# EAGLE board SparkFun_Artemis-Panel (EAGLE 9.3.0), part 1 of 17
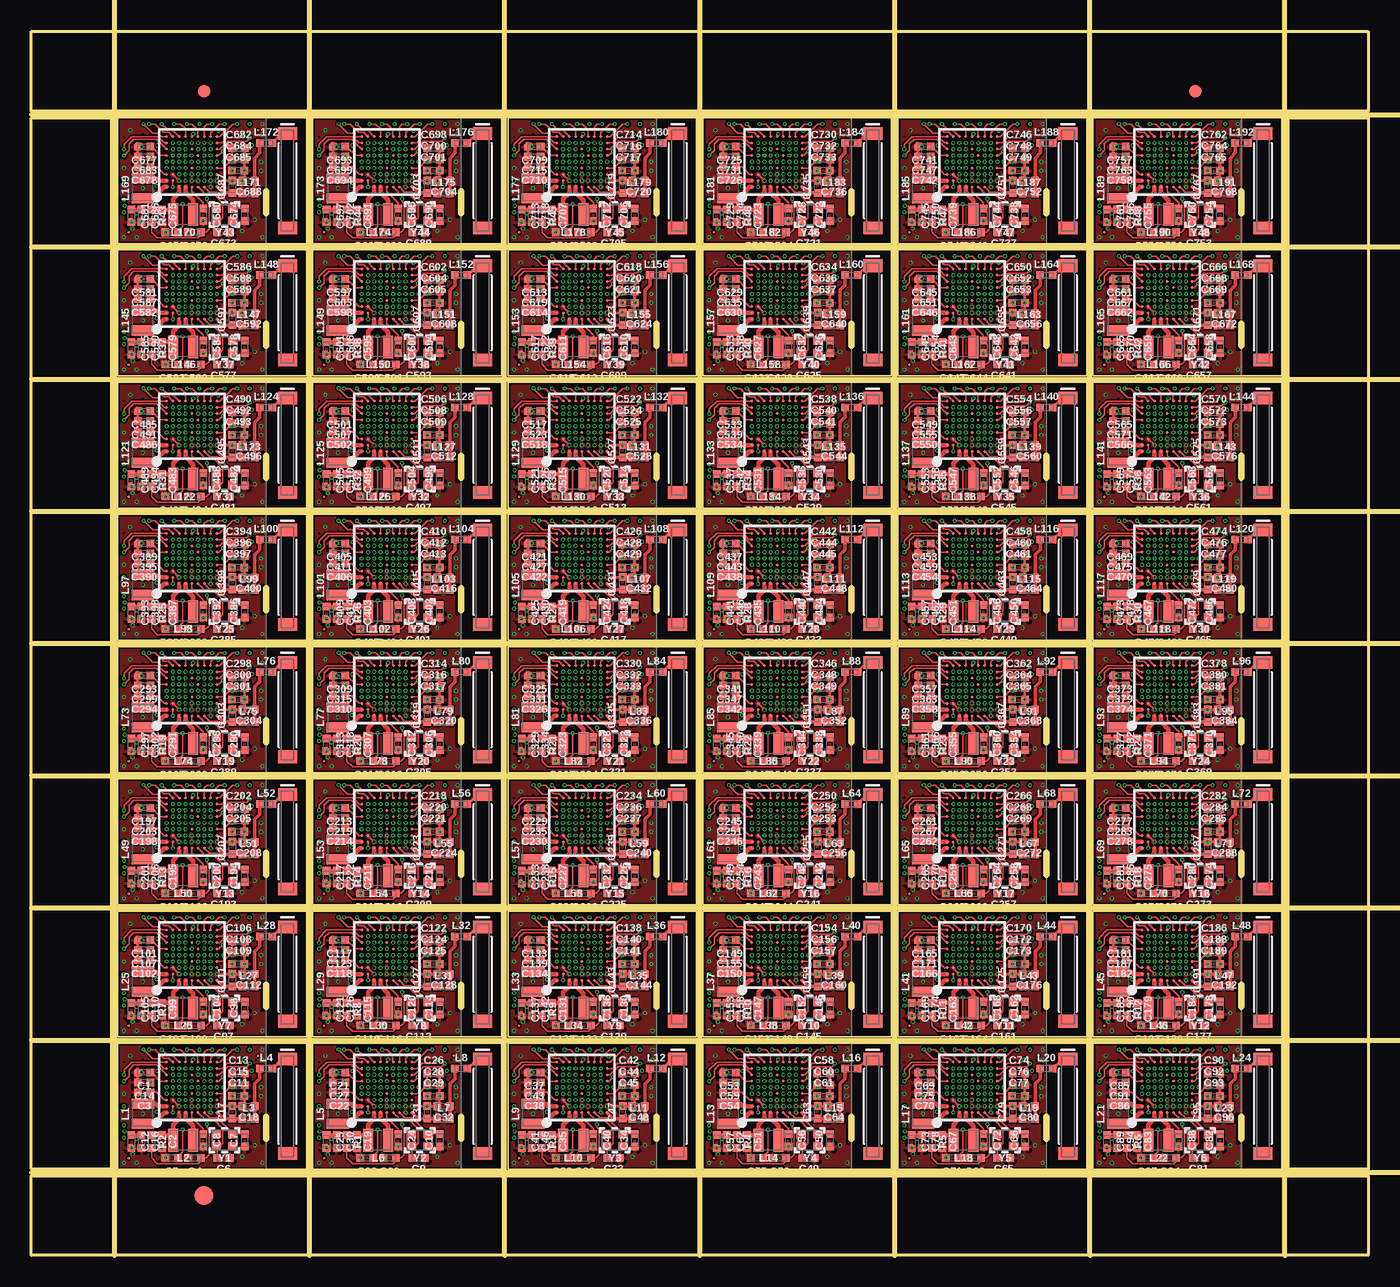
[diagram p0: board, top side]
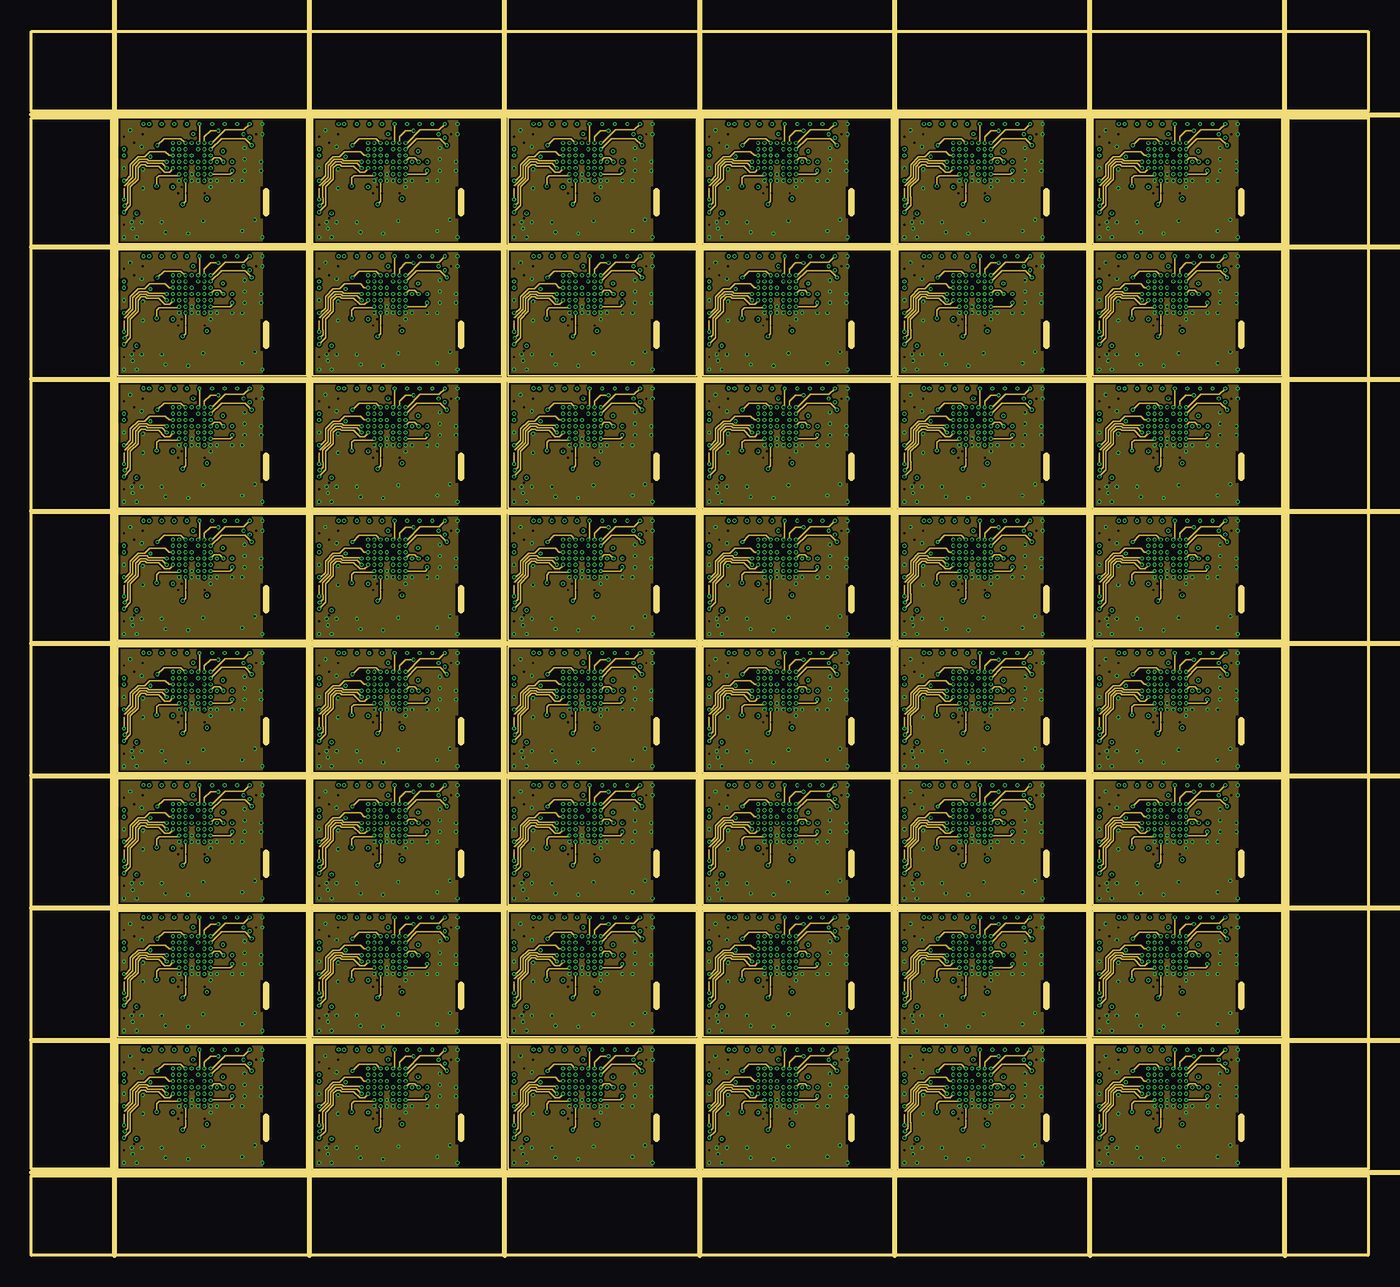
[diagram p1: board, inner layer Route2]
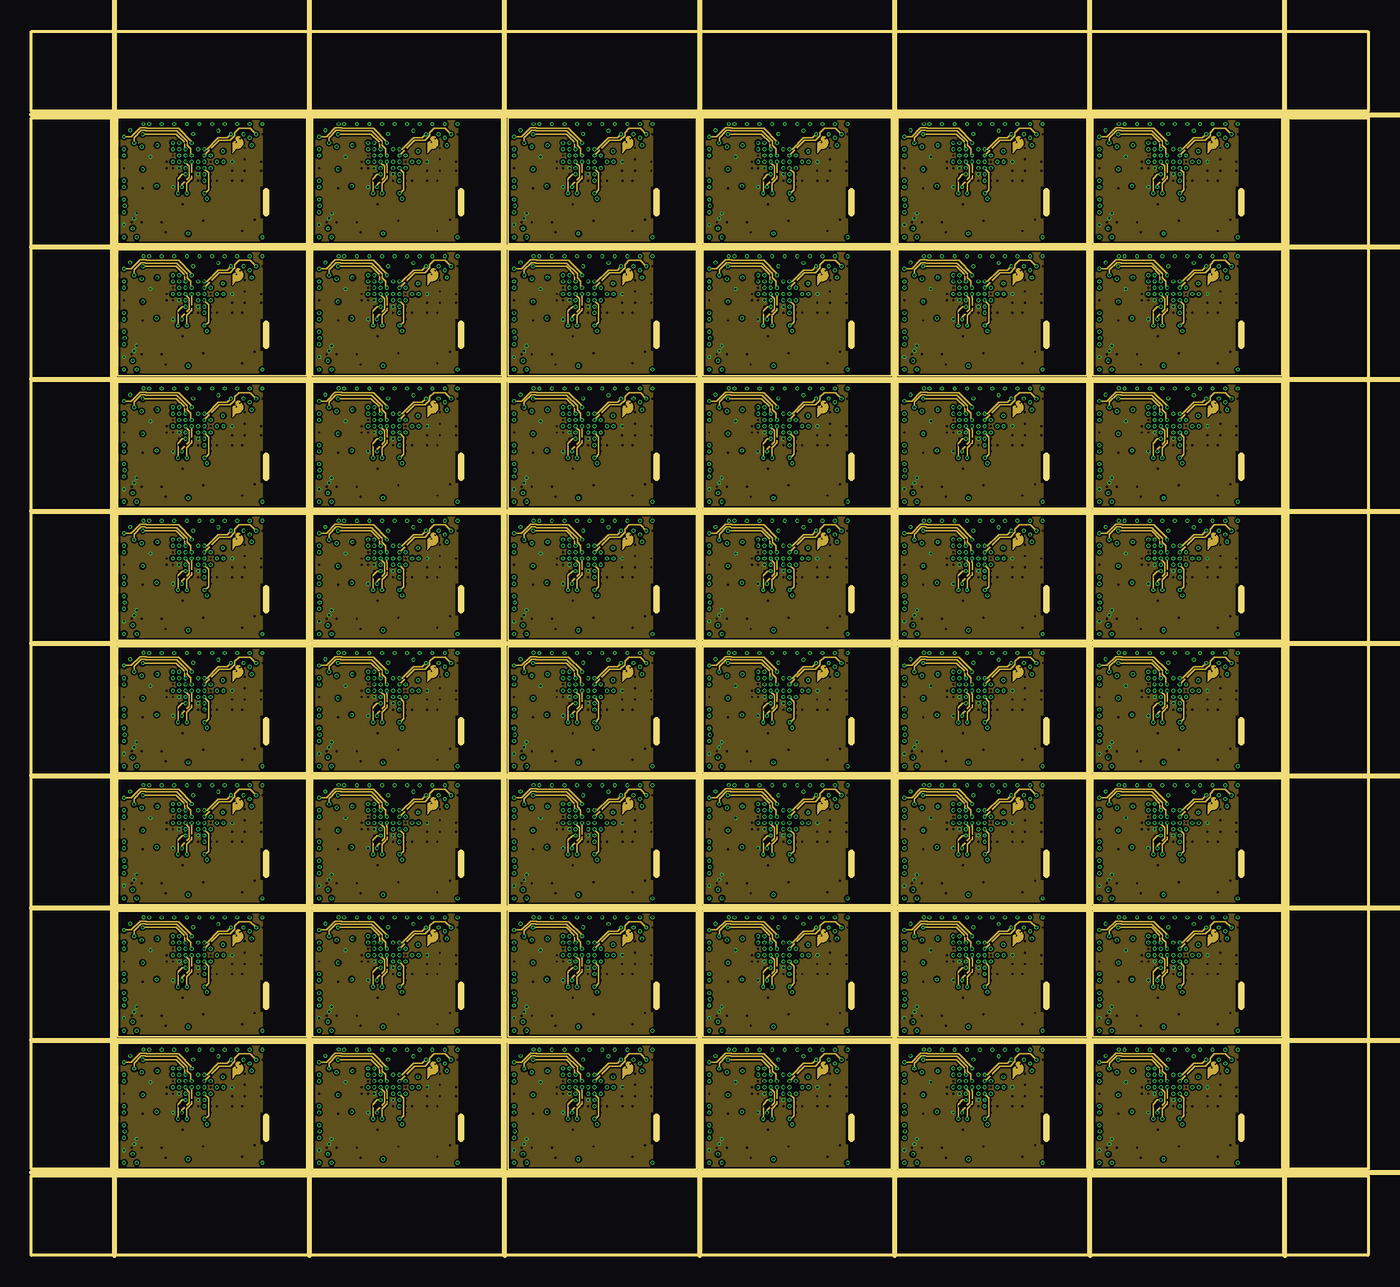
[diagram p2: board, inner layer Route15]
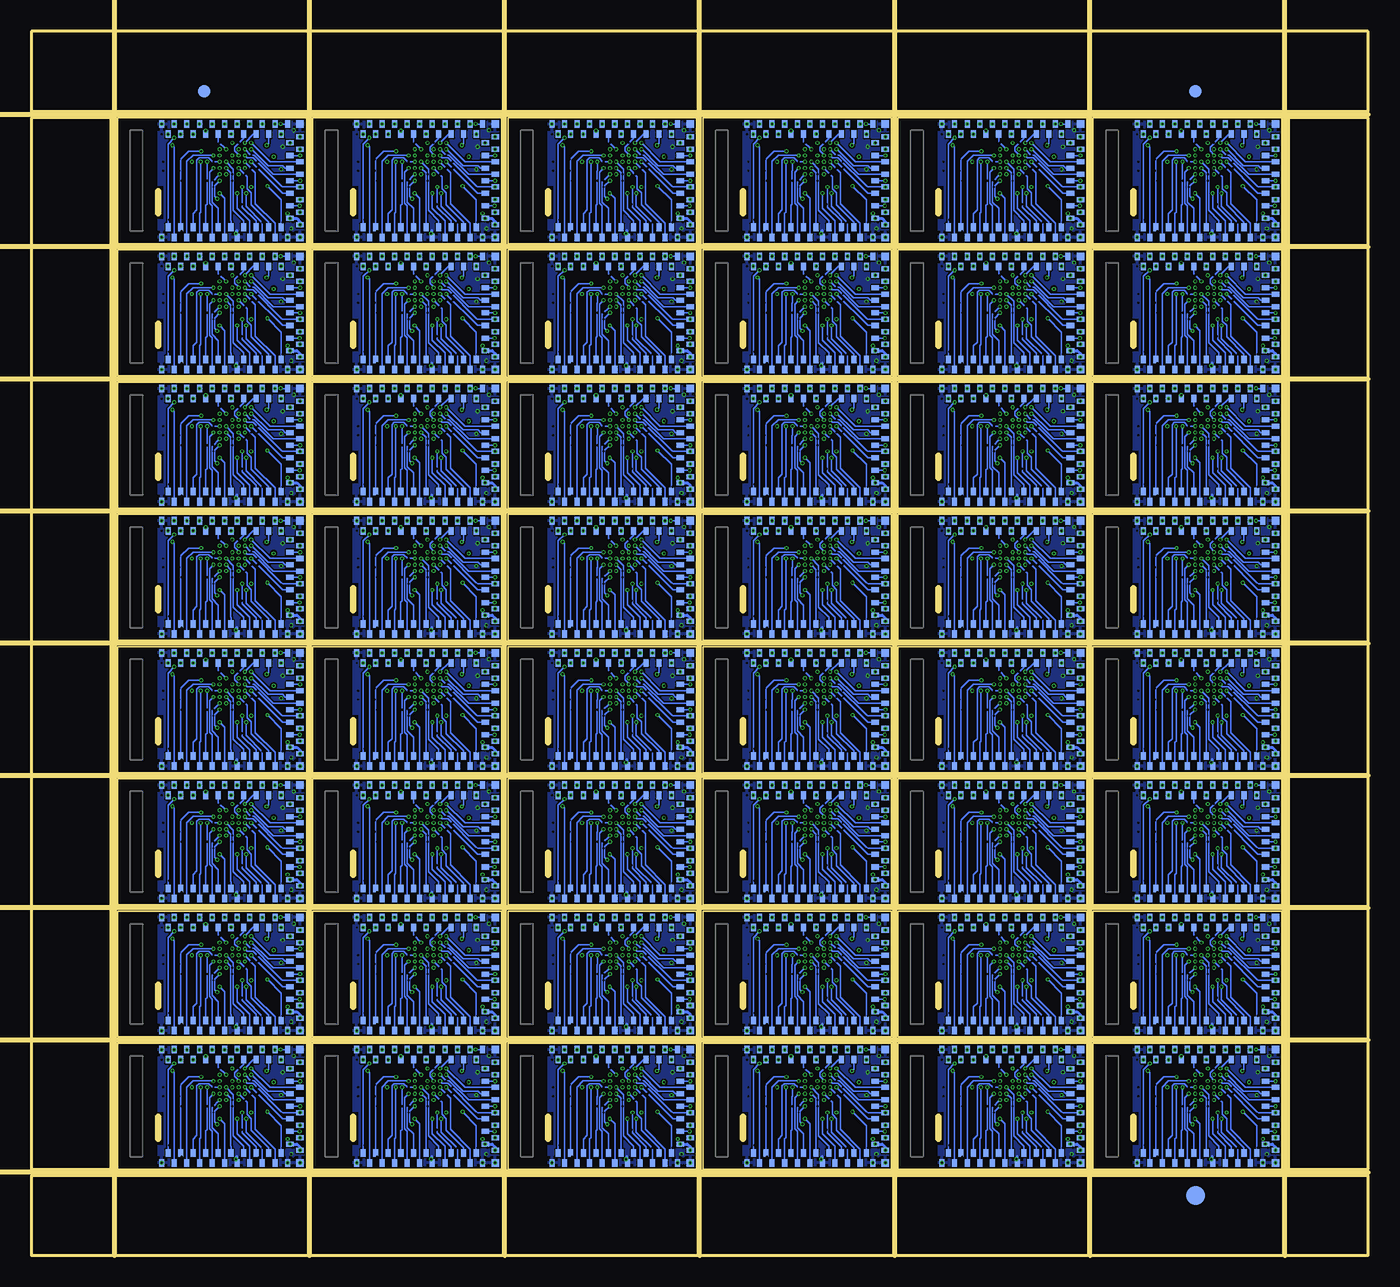
[diagram p3: board, bottom side, seen from below]

Size 106.26 x 97.27 mm. Coordinates in mm from the lower left corner, seen from the top.
Outline: 208 segments
Copper layers ((1*2)+(15*16)): Top 0.035mm / dielectric 0.213359375mm / Route2 0.035mm / dielectric 1.0161mm / Route15 0.035mm / dielectric 0.213359375mm / Bottom 0.035mm
Design rules "SparkFun-4-layer-BGA-Extreme": minimum track width 4mil, minimum drill 0.15mm, track to track 4mil, track to pad 4mil, pad to pad 4mil, via to via 4mil, smd to smd 0mil, copper to edge 4mil, drill to drill 4mil, minimum pad ring 3mil, minimum via ring 3mil, stop-mask expansion 4mil, vias tented up to drill 25mil, thermal gap 10mil
Milling: 64 lines

## Footprints (pad centres in the part's own frame; a part is rotated, then mirrored left to right if it is on the bottom)
ANT-2.4GHZ-8.0X1.0MM = smd 1 x 1.5: FEED -3.75,0; NC 3.75,0
0402-TIGHT = smd 0.6 x 0.6: 1 -0.5,0; 2 0.5,0
FIDUCIAL-1X2 = smd 1 x 1: 1 0,0
FIDUCIAL-1.5X3 = smd 1.5 x 1.5: 1 0,0
FIDUCIAL-0.2MM = smd 0.2 x 0.2: 1 0,0
MODULE_PAD = smd 0.6 x 0.4: 1 0,0
MODULE_MINI_PAD = smd 0.6 x 0.6: 1 0,0
0805-WIDE = smd 0.8 x 1.8: 1 -0.8,0; 2 0.8,0
BGA-81-5X5MM = smd 0.254 x 0.254: A1 -2,2; A2 -1.5,2; A3 -1,2; A4 -0.5,2; A5 0,2; A6 0.5,2; A7 1,2; A8 1.5,2; A9 2,2; B1 -2,1.5; B2 -1.5,1.5; B3 -1,1.5; B4 -0.5,1.5; B5 0,1.5; B6 0.5,1.5; B7 1,1.5; B8 1.5,1.5; B9 2,1.5; C1 -2,1; C2 -1.5,1; C3 -1,1; C4 -0.5,1; C5 0,1; C6 0.5,1; C7 1,1; C8 1.5,1; C9 2,1; D1 -2,0.5; D2 -1.5,0.5; D3 -1,0.5; D4 -0.5,0.5; D5 0,0.5; D6 0.5,0.5; D7 1,0.5; D8 1.5,0.5; D9 2,0.5; E1 -2,0; E2 -1.5,0; E3 -1,0; E4 -0.5,0; E5 0,0; E6 0.5,0; E7 1,0; E8 1.5,0; E9 2,0; F1 -2,-0.5; F2 -1.5,-0.5; F3 -1,-0.5; F4 -0.5,-0.5; F5 0,-0.5; F6 0.5,-0.5; F7 1,-0.5; F8 1.5,-0.5; F9 2,-0.5; G1 -2,-1; G2 -1.5,-1; G3 -1,-1; G4 -0.5,-1; G5 0,-1; G6 0.5,-1; G7 1,-1; G8 1.5,-1; G9 2,-1; H1 -2,-1.5; H2 -1.5,-1.5; H3 -1,-1.5; H4 -0.5,-1.5; H5 0,-1.5; H6 0.5,-1.5; H7 1,-1.5; H8 1.5,-1.5; H9 2,-1.5; J1 -2,-2; J2 -1.5,-2; J3 -1,-2; J4 -0.5,-2; J5 0,-2; J6 0.5,-2; J7 1,-2; J8 1.5,-2; J9 2,-2
CRYSTAL-SMD-2.0X1.6MM = smd 0.75 x 0.7: 1 -0.675,-0.5; 2 0.675,-0.5; 3 0.675,0.5; 4 -0.675,0.5

## Placement (x,y rotation side)
A1  2.4GHZ-3.2X1.6MM  [ANT-2.4GHZ-8.0X1.0MM]  20.36,11.86 270 top
A2  2.4GHZ-3.2X1.6MM  [ANT-2.4GHZ-8.0X1.0MM]  35.87,11.86 270 top
A3  2.4GHZ-3.2X1.6MM  [ANT-2.4GHZ-8.0X1.0MM]  51.37,11.86 270 top
A4  2.4GHZ-3.2X1.6MM  [ANT-2.4GHZ-8.0X1.0MM]  66.88,11.86 270 top
A5  2.4GHZ-3.2X1.6MM  [ANT-2.4GHZ-8.0X1.0MM]  82.39,11.86 270 top
A6  2.4GHZ-3.2X1.6MM  [ANT-2.4GHZ-8.0X1.0MM]  97.9,11.86 270 top
A7  2.4GHZ-3.2X1.6MM  [ANT-2.4GHZ-8.0X1.0MM]  20.36,22.37 270 top
A8  2.4GHZ-3.2X1.6MM  [ANT-2.4GHZ-8.0X1.0MM]  35.87,22.37 270 top
A9  2.4GHZ-3.2X1.6MM  [ANT-2.4GHZ-8.0X1.0MM]  51.37,22.37 270 top
A10  2.4GHZ-3.2X1.6MM  [ANT-2.4GHZ-8.0X1.0MM]  66.88,22.37 270 top
A11  2.4GHZ-3.2X1.6MM  [ANT-2.4GHZ-8.0X1.0MM]  82.39,22.37 270 top
A12  2.4GHZ-3.2X1.6MM  [ANT-2.4GHZ-8.0X1.0MM]  97.9,22.37 270 top
A13  2.4GHZ-3.2X1.6MM  [ANT-2.4GHZ-8.0X1.0MM]  20.36,32.87 270 top
A14  2.4GHZ-3.2X1.6MM  [ANT-2.4GHZ-8.0X1.0MM]  35.87,32.87 270 top
A15  2.4GHZ-3.2X1.6MM  [ANT-2.4GHZ-8.0X1.0MM]  51.37,32.87 270 top
A16  2.4GHZ-3.2X1.6MM  [ANT-2.4GHZ-8.0X1.0MM]  66.88,32.87 270 top
A17  2.4GHZ-3.2X1.6MM  [ANT-2.4GHZ-8.0X1.0MM]  82.39,32.87 270 top
A18  2.4GHZ-3.2X1.6MM  [ANT-2.4GHZ-8.0X1.0MM]  97.9,32.87 270 top
A19  2.4GHZ-3.2X1.6MM  [ANT-2.4GHZ-8.0X1.0MM]  20.36,43.38 270 top
A20  2.4GHZ-3.2X1.6MM  [ANT-2.4GHZ-8.0X1.0MM]  35.87,43.38 270 top
A21  2.4GHZ-3.2X1.6MM  [ANT-2.4GHZ-8.0X1.0MM]  51.37,43.38 270 top
A22  2.4GHZ-3.2X1.6MM  [ANT-2.4GHZ-8.0X1.0MM]  66.88,43.38 270 top
A23  2.4GHZ-3.2X1.6MM  [ANT-2.4GHZ-8.0X1.0MM]  82.39,43.38 270 top
A24  2.4GHZ-3.2X1.6MM  [ANT-2.4GHZ-8.0X1.0MM]  97.9,43.38 270 top
A25  2.4GHZ-3.2X1.6MM  [ANT-2.4GHZ-8.0X1.0MM]  20.36,53.89 270 top
A26  2.4GHZ-3.2X1.6MM  [ANT-2.4GHZ-8.0X1.0MM]  35.87,53.89 270 top
A27  2.4GHZ-3.2X1.6MM  [ANT-2.4GHZ-8.0X1.0MM]  51.37,53.89 270 top
A28  2.4GHZ-3.2X1.6MM  [ANT-2.4GHZ-8.0X1.0MM]  66.88,53.89 270 top
A29  2.4GHZ-3.2X1.6MM  [ANT-2.4GHZ-8.0X1.0MM]  82.39,53.89 270 top
A30  2.4GHZ-3.2X1.6MM  [ANT-2.4GHZ-8.0X1.0MM]  97.9,53.89 270 top
A31  2.4GHZ-3.2X1.6MM  [ANT-2.4GHZ-8.0X1.0MM]  20.36,64.4 270 top
A32  2.4GHZ-3.2X1.6MM  [ANT-2.4GHZ-8.0X1.0MM]  35.87,64.4 270 top
A33  2.4GHZ-3.2X1.6MM  [ANT-2.4GHZ-8.0X1.0MM]  51.37,64.4 270 top
A34  2.4GHZ-3.2X1.6MM  [ANT-2.4GHZ-8.0X1.0MM]  66.88,64.4 270 top
A35  2.4GHZ-3.2X1.6MM  [ANT-2.4GHZ-8.0X1.0MM]  82.39,64.4 270 top
A36  2.4GHZ-3.2X1.6MM  [ANT-2.4GHZ-8.0X1.0MM]  97.9,64.4 270 top
A37  2.4GHZ-3.2X1.6MM  [ANT-2.4GHZ-8.0X1.0MM]  20.36,74.91 270 top
A38  2.4GHZ-3.2X1.6MM  [ANT-2.4GHZ-8.0X1.0MM]  35.87,74.91 270 top
A39  2.4GHZ-3.2X1.6MM  [ANT-2.4GHZ-8.0X1.0MM]  51.37,74.91 270 top
A40  2.4GHZ-3.2X1.6MM  [ANT-2.4GHZ-8.0X1.0MM]  66.88,74.91 270 top
A41  2.4GHZ-3.2X1.6MM  [ANT-2.4GHZ-8.0X1.0MM]  82.39,74.91 270 top
A42  2.4GHZ-3.2X1.6MM  [ANT-2.4GHZ-8.0X1.0MM]  97.9,74.91 270 top
A43  2.4GHZ-3.2X1.6MM  [ANT-2.4GHZ-8.0X1.0MM]  20.36,85.41 270 top
A44  2.4GHZ-3.2X1.6MM  [ANT-2.4GHZ-8.0X1.0MM]  35.87,85.41 270 top
A45  2.4GHZ-3.2X1.6MM  [ANT-2.4GHZ-8.0X1.0MM]  51.37,85.41 270 top
A46  2.4GHZ-3.2X1.6MM  [ANT-2.4GHZ-8.0X1.0MM]  66.88,85.41 270 top
A47  2.4GHZ-3.2X1.6MM  [ANT-2.4GHZ-8.0X1.0MM]  82.39,85.41 270 top
A48  2.4GHZ-3.2X1.6MM  [ANT-2.4GHZ-8.0X1.0MM]  97.9,85.41 270 top
C1  0.47uF  [0402-TIGHT]  8.96,14.56 180 top
C2  4.7uF  [0402-TIGHT]  10.36,9.06 270 top
C3  2.2uF  [0402-TIGHT]  8.96,12.96 180 top
C4  1.0uF  [0402-TIGHT]  12.96,7.76 180 top
C5  2.2uF  [0402-TIGHT]  11.16,7.76 180 top
C6  6pF  [0402-TIGHT]  15.26,7.76 180 top
C7  6pF  [0402-TIGHT]  16.96,9.16 90 top
C8  2.2uF  [0402-TIGHT]  13.66,9.16 270 top
C9  6pF  [0402-TIGHT]  30.77,7.76 180 top
C10  6pF  [0402-TIGHT]  32.47,9.16 90 top
C11  47nF  [0402-TIGHT]  16.45,12.66 0 top
C12  1.0uF  [0402-TIGHT]  7.96,9.06 270 top
C13  1.0uF  [0402-TIGHT]  16.46,14.46 0 top
C14  1.0uF  [0402-TIGHT]  8.96,13.76 180 top
C15  1.0uF  [0402-TIGHT]  16.46,13.56 0 top
C16  2.2uF  [0402-TIGHT]  8.76,9.06 270 top
C17  DNP  [0402-TIGHT]  15.98,11.38 90 top
C18  0.5pF  [0402-TIGHT]  17.26,11.86 180 top
C19  4.7uF  [0402-TIGHT]  25.87,9.06 270 top
C20  1.0uF  [0402-TIGHT]  28.47,7.76 180 top
C21  0.47uF  [0402-TIGHT]  24.47,14.56 180 top
C22  2.2uF  [0402-TIGHT]  24.47,12.96 180 top
C23  2.2uF  [0402-TIGHT]  26.67,7.76 180 top
C24  2.2uF  [0402-TIGHT]  29.17,9.16 270 top
C25  1.0uF  [0402-TIGHT]  23.47,9.06 270 top
C26  1.0uF  [0402-TIGHT]  31.97,14.46 0 top
C27  1.0uF  [0402-TIGHT]  24.47,13.76 180 top
C28  1.0uF  [0402-TIGHT]  31.97,13.56 0 top
C29  47nF  [0402-TIGHT]  31.95,12.66 0 top
C30  2.2uF  [0402-TIGHT]  24.27,9.06 270 top
C31  DNP  [0402-TIGHT]  31.49,11.38 90 top
C32  0.5pF  [0402-TIGHT]  32.77,11.86 180 top
C33  6pF  [0402-TIGHT]  46.27,7.76 180 top
C34  6pF  [0402-TIGHT]  47.97,9.16 90 top
C35  4.7uF  [0402-TIGHT]  41.37,9.06 270 top
C36  1.0uF  [0402-TIGHT]  43.97,7.76 180 top
C37  0.47uF  [0402-TIGHT]  39.97,14.56 180 top
C38  2.2uF  [0402-TIGHT]  39.97,12.96 180 top
C39  2.2uF  [0402-TIGHT]  42.17,7.76 180 top
C40  2.2uF  [0402-TIGHT]  44.67,9.16 270 top
C41  1.0uF  [0402-TIGHT]  38.97,9.06 270 top
C42  1.0uF  [0402-TIGHT]  47.47,14.46 0 top
C43  1.0uF  [0402-TIGHT]  39.97,13.76 180 top
C44  1.0uF  [0402-TIGHT]  47.47,13.56 0 top
C45  47nF  [0402-TIGHT]  47.46,12.66 0 top
C46  2.2uF  [0402-TIGHT]  39.77,9.06 270 top
C47  DNP  [0402-TIGHT]  46.99,11.38 90 top
C48  0.5pF  [0402-TIGHT]  48.27,11.86 180 top
C49  6pF  [0402-TIGHT]  61.78,7.76 180 top
C50  6pF  [0402-TIGHT]  63.48,9.16 90 top
C51  4.7uF  [0402-TIGHT]  56.88,9.06 270 top
C52  1.0uF  [0402-TIGHT]  59.48,7.76 180 top
C53  0.47uF  [0402-TIGHT]  55.48,14.56 180 top
C54  2.2uF  [0402-TIGHT]  55.48,12.96 180 top
C55  2.2uF  [0402-TIGHT]  57.68,7.76 180 top
C56  2.2uF  [0402-TIGHT]  60.18,9.16 270 top
C57  1.0uF  [0402-TIGHT]  54.48,9.06 270 top
C58  1.0uF  [0402-TIGHT]  62.98,14.46 0 top
C59  1.0uF  [0402-TIGHT]  55.48,13.76 180 top
C60  1.0uF  [0402-TIGHT]  62.98,13.56 0 top
C61  47nF  [0402-TIGHT]  62.97,12.66 0 top
C62  2.2uF  [0402-TIGHT]  55.28,9.06 270 top
C63  DNP  [0402-TIGHT]  62.5,11.38 90 top
C64  0.5pF  [0402-TIGHT]  63.78,11.86 180 top
C65  6pF  [0402-TIGHT]  77.29,7.76 180 top
C66  6pF  [0402-TIGHT]  78.99,9.16 90 top
C67  4.7uF  [0402-TIGHT]  72.39,9.06 270 top
C68  1.0uF  [0402-TIGHT]  74.99,7.76 180 top
C69  0.47uF  [0402-TIGHT]  70.99,14.56 180 top
C70  2.2uF  [0402-TIGHT]  70.99,12.96 180 top
C71  2.2uF  [0402-TIGHT]  73.19,7.76 180 top
C72  2.2uF  [0402-TIGHT]  75.69,9.16 270 top
C73  1.0uF  [0402-TIGHT]  69.99,9.06 270 top
C74  1.0uF  [0402-TIGHT]  78.49,14.46 0 top
C75  1.0uF  [0402-TIGHT]  70.99,13.76 180 top
C76  1.0uF  [0402-TIGHT]  78.49,13.56 0 top
C77  47nF  [0402-TIGHT]  78.48,12.66 0 top
C78  2.2uF  [0402-TIGHT]  70.79,9.06 270 top
C79  DNP  [0402-TIGHT]  78.01,11.38 90 top
C80  0.5pF  [0402-TIGHT]  79.29,11.86 180 top
C81  6pF  [0402-TIGHT]  92.8,7.76 180 top
C82  6pF  [0402-TIGHT]  94.5,9.16 90 top
C83  4.7uF  [0402-TIGHT]  87.9,9.06 270 top
C84  1.0uF  [0402-TIGHT]  90.5,7.76 180 top
C85  0.47uF  [0402-TIGHT]  86.5,14.56 180 top
C86  2.2uF  [0402-TIGHT]  86.5,12.96 180 top
C87  2.2uF  [0402-TIGHT]  88.7,7.76 180 top
C88  2.2uF  [0402-TIGHT]  91.2,9.16 270 top
C89  1.0uF  [0402-TIGHT]  85.5,9.06 270 top
C90  1.0uF  [0402-TIGHT]  94,14.46 0 top
C91  1.0uF  [0402-TIGHT]  86.5,13.76 180 top
C92  1.0uF  [0402-TIGHT]  94,13.56 0 top
C93  47nF  [0402-TIGHT]  93.99,12.66 0 top
C94  2.2uF  [0402-TIGHT]  86.3,9.06 270 top
C95  DNP  [0402-TIGHT]  93.52,11.38 90 top
C96  0.5pF  [0402-TIGHT]  94.8,11.86 180 top
C97  6pF  [0402-TIGHT]  15.26,18.27 180 top
C98  6pF  [0402-TIGHT]  16.96,19.67 90 top
C99  4.7uF  [0402-TIGHT]  10.36,19.57 270 top
C100  1.0uF  [0402-TIGHT]  12.96,18.27 180 top
C101  0.47uF  [0402-TIGHT]  8.96,25.07 180 top
C102  2.2uF  [0402-TIGHT]  8.96,23.47 180 top
C103  2.2uF  [0402-TIGHT]  11.16,18.27 180 top
C104  2.2uF  [0402-TIGHT]  13.66,19.67 270 top
C105  1.0uF  [0402-TIGHT]  7.96,19.57 270 top
C106  1.0uF  [0402-TIGHT]  16.46,24.97 0 top
C107  1.0uF  [0402-TIGHT]  8.96,24.27 180 top
C108  1.0uF  [0402-TIGHT]  16.46,24.07 0 top
C109  47nF  [0402-TIGHT]  16.45,23.17 0 top
C110  2.2uF  [0402-TIGHT]  8.76,19.57 270 top
C111  DNP  [0402-TIGHT]  15.98,21.89 90 top
C112  0.5pF  [0402-TIGHT]  17.26,22.37 180 top
C113  6pF  [0402-TIGHT]  30.77,18.27 180 top
C114  6pF  [0402-TIGHT]  32.47,19.67 90 top
C115  4.7uF  [0402-TIGHT]  25.87,19.57 270 top
C116  1.0uF  [0402-TIGHT]  28.47,18.27 180 top
C117  0.47uF  [0402-TIGHT]  24.47,25.07 180 top
C118  2.2uF  [0402-TIGHT]  24.47,23.47 180 top
C119  2.2uF  [0402-TIGHT]  26.67,18.27 180 top
C120  2.2uF  [0402-TIGHT]  29.17,19.67 270 top
C121  1.0uF  [0402-TIGHT]  23.47,19.57 270 top
C122  1.0uF  [0402-TIGHT]  31.97,24.97 0 top
C123  1.0uF  [0402-TIGHT]  24.47,24.27 180 top
C124  1.0uF  [0402-TIGHT]  31.97,24.07 0 top
C125  47nF  [0402-TIGHT]  31.95,23.17 0 top
C126  2.2uF  [0402-TIGHT]  24.27,19.57 270 top
C127  DNP  [0402-TIGHT]  31.49,21.89 90 top
C128  0.5pF  [0402-TIGHT]  32.77,22.37 180 top
C129  6pF  [0402-TIGHT]  46.27,18.27 180 top
C130  6pF  [0402-TIGHT]  47.97,19.67 90 top
C131  4.7uF  [0402-TIGHT]  41.37,19.57 270 top
C132  1.0uF  [0402-TIGHT]  43.97,18.27 180 top
C133  0.47uF  [0402-TIGHT]  39.97,25.07 180 top
C134  2.2uF  [0402-TIGHT]  39.97,23.47 180 top
C135  2.2uF  [0402-TIGHT]  42.17,18.27 180 top
C136  2.2uF  [0402-TIGHT]  44.67,19.67 270 top
C137  1.0uF  [0402-TIGHT]  38.97,19.57 270 top
C138  1.0uF  [0402-TIGHT]  47.47,24.97 0 top
C139  1.0uF  [0402-TIGHT]  39.97,24.27 180 top
C140  1.0uF  [0402-TIGHT]  47.47,24.07 0 top
C141  47nF  [0402-TIGHT]  47.46,23.17 0 top
C142  2.2uF  [0402-TIGHT]  39.77,19.57 270 top
C143  DNP  [0402-TIGHT]  46.99,21.89 90 top
C144  0.5pF  [0402-TIGHT]  48.27,22.37 180 top
C145  6pF  [0402-TIGHT]  61.78,18.27 180 top
C146  6pF  [0402-TIGHT]  63.48,19.67 90 top
C147  4.7uF  [0402-TIGHT]  56.88,19.57 270 top
C148  1.0uF  [0402-TIGHT]  59.48,18.27 180 top
C149  0.47uF  [0402-TIGHT]  55.48,25.07 180 top
C150  2.2uF  [0402-TIGHT]  55.48,23.47 180 top
C151  2.2uF  [0402-TIGHT]  57.68,18.27 180 top
C152  2.2uF  [0402-TIGHT]  60.18,19.67 270 top
C153  1.0uF  [0402-TIGHT]  54.48,19.57 270 top
C154  1.0uF  [0402-TIGHT]  62.98,24.97 0 top
C155  1.0uF  [0402-TIGHT]  55.48,24.27 180 top
C156  1.0uF  [0402-TIGHT]  62.98,24.07 0 top
C157  47nF  [0402-TIGHT]  62.97,23.17 0 top
C158  2.2uF  [0402-TIGHT]  55.28,19.57 270 top
C159  DNP  [0402-TIGHT]  62.5,21.89 90 top
C160  0.5pF  [0402-TIGHT]  63.78,22.37 180 top
C161  6pF  [0402-TIGHT]  77.29,18.27 180 top
C162  6pF  [0402-TIGHT]  78.99,19.67 90 top
C163  4.7uF  [0402-TIGHT]  72.39,19.57 270 top
C164  1.0uF  [0402-TIGHT]  74.99,18.27 180 top
C165  0.47uF  [0402-TIGHT]  70.99,25.07 180 top
C166  2.2uF  [0402-TIGHT]  70.99,23.47 180 top
C167  2.2uF  [0402-TIGHT]  73.19,18.27 180 top
C168  2.2uF  [0402-TIGHT]  75.69,19.67 270 top
C169  1.0uF  [0402-TIGHT]  69.99,19.57 270 top
C170  1.0uF  [0402-TIGHT]  78.49,24.97 0 top
C171  1.0uF  [0402-TIGHT]  70.99,24.27 180 top
C172  1.0uF  [0402-TIGHT]  78.49,24.07 0 top
C173  47nF  [0402-TIGHT]  78.48,23.17 0 top
C174  2.2uF  [0402-TIGHT]  70.79,19.57 270 top
C175  DNP  [0402-TIGHT]  78.01,21.89 90 top
C176  0.5pF  [0402-TIGHT]  79.29,22.37 180 top
C177  6pF  [0402-TIGHT]  92.8,18.27 180 top
C178  6pF  [0402-TIGHT]  94.5,19.67 90 top
C179  4.7uF  [0402-TIGHT]  87.9,19.57 270 top
C180  1.0uF  [0402-TIGHT]  90.5,18.27 180 top
C181  0.47uF  [0402-TIGHT]  86.5,25.07 180 top
C182  2.2uF  [0402-TIGHT]  86.5,23.47 180 top
C183  2.2uF  [0402-TIGHT]  88.7,18.27 180 top
C184  2.2uF  [0402-TIGHT]  91.2,19.67 270 top
C185  1.0uF  [0402-TIGHT]  85.5,19.57 270 top
C186  1.0uF  [0402-TIGHT]  94,24.97 0 top
C187  1.0uF  [0402-TIGHT]  86.5,24.27 180 top
C188  1.0uF  [0402-TIGHT]  94,24.07 0 top
C189  47nF  [0402-TIGHT]  93.99,23.17 0 top
C190  2.2uF  [0402-TIGHT]  86.3,19.57 270 top
C191  DNP  [0402-TIGHT]  93.52,21.89 90 top
C192  0.5pF  [0402-TIGHT]  94.8,22.37 180 top
C193  6pF  [0402-TIGHT]  15.26,28.77 180 top
C194  6pF  [0402-TIGHT]  16.96,30.17 90 top
C195  4.7uF  [0402-TIGHT]  10.36,30.07 270 top
C196  1.0uF  [0402-TIGHT]  12.96,28.77 180 top
C197  0.47uF  [0402-TIGHT]  8.96,35.57 180 top
C198  2.2uF  [0402-TIGHT]  8.96,33.97 180 top
C199  2.2uF  [0402-TIGHT]  11.16,28.77 180 top
C200  2.2uF  [0402-TIGHT]  13.66,30.17 270 top
C201  1.0uF  [0402-TIGHT]  7.96,30.07 270 top
C202  1.0uF  [0402-TIGHT]  16.46,35.47 0 top
C203  1.0uF  [0402-TIGHT]  8.96,34.77 180 top
C204  1.0uF  [0402-TIGHT]  16.46,34.57 0 top
C205  47nF  [0402-TIGHT]  16.45,33.67 0 top
C206  2.2uF  [0402-TIGHT]  8.76,30.07 270 top
C207  DNP  [0402-TIGHT]  15.98,32.4 90 top
C208  0.5pF  [0402-TIGHT]  17.26,32.87 180 top
C209  6pF  [0402-TIGHT]  30.77,28.77 180 top
C210  6pF  [0402-TIGHT]  32.47,30.17 90 top
C211  4.7uF  [0402-TIGHT]  25.87,30.07 270 top
C212  1.0uF  [0402-TIGHT]  28.47,28.77 180 top
C213  0.47uF  [0402-TIGHT]  24.47,35.57 180 top
C214  2.2uF  [0402-TIGHT]  24.47,33.97 180 top
C215  2.2uF  [0402-TIGHT]  26.67,28.77 180 top
C216  2.2uF  [0402-TIGHT]  29.17,30.17 270 top
C217  1.0uF  [0402-TIGHT]  23.47,30.07 270 top
C218  1.0uF  [0402-TIGHT]  31.97,35.47 0 top
C219  1.0uF  [0402-TIGHT]  24.47,34.77 180 top
C220  1.0uF  [0402-TIGHT]  31.97,34.57 0 top
C221  47nF  [0402-TIGHT]  31.95,33.67 0 top
C222  2.2uF  [0402-TIGHT]  24.27,30.07 270 top
C223  DNP  [0402-TIGHT]  31.49,32.4 90 top
C224  0.5pF  [0402-TIGHT]  32.77,32.87 180 top
C225  6pF  [0402-TIGHT]  46.27,28.77 180 top
C226  6pF  [0402-TIGHT]  47.97,30.17 90 top
C227  4.7uF  [0402-TIGHT]  41.37,30.07 270 top
C228  1.0uF  [0402-TIGHT]  43.97,28.77 180 top
C229  0.47uF  [0402-TIGHT]  39.97,35.57 180 top
C230  2.2uF  [0402-TIGHT]  39.97,33.97 180 top
C231  2.2uF  [0402-TIGHT]  42.17,28.77 180 top
C232  2.2uF  [0402-TIGHT]  44.67,30.17 270 top
C233  1.0uF  [0402-TIGHT]  38.97,30.07 270 top
C234  1.0uF  [0402-TIGHT]  47.47,35.47 0 top
C235  1.0uF  [0402-TIGHT]  39.97,34.77 180 top
C236  1.0uF  [0402-TIGHT]  47.47,34.57 0 top
C237  47nF  [0402-TIGHT]  47.46,33.67 0 top
C238  2.2uF  [0402-TIGHT]  39.77,30.07 270 top
C239  DNP  [0402-TIGHT]  46.99,32.4 90 top
C240  0.5pF  [0402-TIGHT]  48.27,32.87 180 top
C241  6pF  [0402-TIGHT]  61.78,28.77 180 top
C242  6pF  [0402-TIGHT]  63.48,30.17 90 top
C243  4.7uF  [0402-TIGHT]  56.88,30.07 270 top
C244  1.0uF  [0402-TIGHT]  59.48,28.77 180 top
C245  0.47uF  [0402-TIGHT]  55.48,35.57 180 top
C246  2.2uF  [0402-TIGHT]  55.48,33.97 180 top
C247  2.2uF  [0402-TIGHT]  57.68,28.77 180 top
C248  2.2uF  [0402-TIGHT]  60.18,30.17 270 top
C249  1.0uF  [0402-TIGHT]  54.48,30.07 270 top
C250  1.0uF  [0402-TIGHT]  62.98,35.47 0 top
C251  1.0uF  [0402-TIGHT]  55.48,34.77 180 top
C252  1.0uF  [0402-TIGHT]  62.98,34.57 0 top
C253  47nF  [0402-TIGHT]  62.97,33.67 0 top
C254  2.2uF  [0402-TIGHT]  55.28,30.07 270 top
C255  DNP  [0402-TIGHT]  62.5,32.4 90 top
C256  0.5pF  [0402-TIGHT]  63.78,32.87 180 top
C257  6pF  [0402-TIGHT]  77.29,28.77 180 top
C258  6pF  [0402-TIGHT]  78.99,30.17 90 top
C259  4.7uF  [0402-TIGHT]  72.39,30.07 270 top
C260  1.0uF  [0402-TIGHT]  74.99,28.77 180 top
C261  0.47uF  [0402-TIGHT]  70.99,35.57 180 top
C262  2.2uF  [0402-TIGHT]  70.99,33.97 180 top
C263  2.2uF  [0402-TIGHT]  73.19,28.77 180 top
C264  2.2uF  [0402-TIGHT]  75.69,30.17 270 top
C265  1.0uF  [0402-TIGHT]  69.99,30.07 270 top
C266  1.0uF  [0402-TIGHT]  78.49,35.47 0 top
C267  1.0uF  [0402-TIGHT]  70.99,34.77 180 top
C268  1.0uF  [0402-TIGHT]  78.49,34.57 0 top
C269  47nF  [0402-TIGHT]  78.48,33.67 0 top
C270  2.2uF  [0402-TIGHT]  70.79,30.07 270 top
C271  DNP  [0402-TIGHT]  78.01,32.4 90 top
C272  0.5pF  [0402-TIGHT]  79.29,32.87 180 top
C273  6pF  [0402-TIGHT]  92.8,28.77 180 top
C274  6pF  [0402-TIGHT]  94.5,30.17 90 top
C275  4.7uF  [0402-TIGHT]  87.9,30.07 270 top
C276  1.0uF  [0402-TIGHT]  90.5,28.77 180 top
C277  0.47uF  [0402-TIGHT]  86.5,35.57 180 top
C278  2.2uF  [0402-TIGHT]  86.5,33.97 180 top
C279  2.2uF  [0402-TIGHT]  88.7,28.77 180 top
C280  2.2uF  [0402-TIGHT]  91.2,30.17 270 top
C281  1.0uF  [0402-TIGHT]  85.5,30.07 270 top
C282  1.0uF  [0402-TIGHT]  94,35.47 0 top
C283  1.0uF  [0402-TIGHT]  86.5,34.77 180 top
C284  1.0uF  [0402-TIGHT]  94,34.57 0 top
C285  47nF  [0402-TIGHT]  93.99,33.67 0 top
C286  2.2uF  [0402-TIGHT]  86.3,30.07 270 top
C287  DNP  [0402-TIGHT]  93.52,32.4 90 top
C288  0.5pF  [0402-TIGHT]  94.8,32.87 180 top
C289  6pF  [0402-TIGHT]  15.26,39.28 180 top
C290  6pF  [0402-TIGHT]  16.96,40.68 90 top
C291  4.7uF  [0402-TIGHT]  10.36,40.58 270 top
C292  1.0uF  [0402-TIGHT]  12.96,39.28 180 top
C293  0.47uF  [0402-TIGHT]  8.96,46.08 180 top
C294  2.2uF  [0402-TIGHT]  8.96,44.48 180 top
C295  2.2uF  [0402-TIGHT]  11.16,39.28 180 top
C296  2.2uF  [0402-TIGHT]  13.66,40.68 270 top
C297  1.0uF  [0402-TIGHT]  7.96,40.58 270 top
C298  1.0uF  [0402-TIGHT]  16.46,45.98 0 top
C299  1.0uF  [0402-TIGHT]  8.96,45.28 180 top
C300  1.0uF  [0402-TIGHT]  16.46,45.08 0 top
C301  47nF  [0402-TIGHT]  16.45,44.18 0 top
C302  2.2uF  [0402-TIGHT]  8.76,40.58 270 top
C303  DNP  [0402-TIGHT]  15.98,42.9 90 top
C304  0.5pF  [0402-TIGHT]  17.26,43.38 180 top
C305  6pF  [0402-TIGHT]  30.77,39.28 180 top
C306  6pF  [0402-TIGHT]  32.47,40.68 90 top
C307  4.7uF  [0402-TIGHT]  25.87,40.58 270 top
C308  1.0uF  [0402-TIGHT]  28.47,39.28 180 top
C309  0.47uF  [0402-TIGHT]  24.47,46.08 180 top
C310  2.2uF  [0402-TIGHT]  24.47,44.48 180 top
C311  2.2uF  [0402-TIGHT]  26.67,39.28 180 top
C312  2.2uF  [0402-TIGHT]  29.17,40.68 270 top
C313  1.0uF  [0402-TIGHT]  23.47,40.58 270 top
C314  1.0uF  [0402-TIGHT]  31.97,45.98 0 top
C315  1.0uF  [0402-TIGHT]  24.47,45.28 180 top
C316  1.0uF  [0402-TIGHT]  31.97,45.08 0 top
C317  47nF  [0402-TIGHT]  31.95,44.18 0 top
C318  2.2uF  [0402-TIGHT]  24.27,40.58 270 top
C319  DNP  [0402-TIGHT]  31.49,42.9 90 top
C320  0.5pF  [0402-TIGHT]  32.77,43.38 180 top
C321  6pF  [0402-TIGHT]  46.27,39.28 180 top
C322  6pF  [0402-TIGHT]  47.97,40.68 90 top
C323  4.7uF  [0402-TIGHT]  41.37,40.58 270 top
C324  1.0uF  [0402-TIGHT]  43.97,39.28 180 top
C325  0.47uF  [0402-TIGHT]  39.97,46.08 180 top
C326  2.2uF  [0402-TIGHT]  39.97,44.48 180 top
C327  2.2uF  [0402-TIGHT]  42.17,39.28 180 top
C328  2.2uF  [0402-TIGHT]  44.67,40.68 270 top
C329  1.0uF  [0402-TIGHT]  38.97,40.58 270 top
C330  1.0uF  [0402-TIGHT]  47.47,45.98 0 top
C331  1.0uF  [0402-TIGHT]  39.97,45.28 180 top
C332  1.0uF  [0402-TIGHT]  47.47,45.08 0 top
C333  47nF  [0402-TIGHT]  47.46,44.18 0 top
C334  2.2uF  [0402-TIGHT]  39.77,40.58 270 top
C335  DNP  [0402-TIGHT]  46.99,42.9 90 top
C336  0.5pF  [0402-TIGHT]  48.27,43.38 180 top
C337  6pF  [0402-TIGHT]  61.78,39.28 180 top
C338  6pF  [0402-TIGHT]  63.48,40.68 90 top
C339  4.7uF  [0402-TIGHT]  56.88,40.58 270 top
C340  1.0uF  [0402-TIGHT]  59.48,39.28 180 top
C341  0.47uF  [0402-TIGHT]  55.48,46.08 180 top
C342  2.2uF  [0402-TIGHT]  55.48,44.48 180 top
C343  2.2uF  [0402-TIGHT]  57.68,39.28 180 top
C344  2.2uF  [0402-TIGHT]  60.18,40.68 270 top
C345  1.0uF  [0402-TIGHT]  54.48,40.58 270 top
C346  1.0uF  [0402-TIGHT]  62.98,45.98 0 top
C347  1.0uF  [0402-TIGHT]  55.48,45.28 180 top
C348  1.0uF  [0402-TIGHT]  62.98,45.08 0 top
C349  47nF  [0402-TIGHT]  62.97,44.18 0 top
C350  2.2uF  [0402-TIGHT]  55.28,40.58 270 top
C351  DNP  [0402-TIGHT]  62.5,42.9 90 top
C352  0.5pF  [0402-TIGHT]  63.78,43.38 180 top
C353  6pF  [0402-TIGHT]  77.29,39.28 180 top
C354  6pF  [0402-TIGHT]  78.99,40.68 90 top
C355  4.7uF  [0402-TIGHT]  72.39,40.58 270 top
C356  1.0uF  [0402-TIGHT]  74.99,39.28 180 top
C357  0.47uF  [0402-TIGHT]  70.99,46.08 180 top
C358  2.2uF  [0402-TIGHT]  70.99,44.48 180 top
C359  2.2uF  [0402-TIGHT]  73.19,39.28 180 top
C360  2.2uF  [0402-TIGHT]  75.69,40.68 270 top
C361  1.0uF  [0402-TIGHT]  69.99,40.58 270 top
C362  1.0uF  [0402-TIGHT]  78.49,45.98 0 top
C363  1.0uF  [0402-TIGHT]  70.99,45.28 180 top
C364  1.0uF  [0402-TIGHT]  78.49,45.08 0 top
C365  47nF  [0402-TIGHT]  78.48,44.18 0 top
C366  2.2uF  [0402-TIGHT]  70.79,40.58 270 top
C367  DNP  [0402-TIGHT]  78.01,42.9 90 top
C368  0.5pF  [0402-TIGHT]  79.29,43.38 180 top
C369  6pF  [0402-TIGHT]  92.8,39.28 180 top
C370  6pF  [0402-TIGHT]  94.5,40.68 90 top
C371  4.7uF  [0402-TIGHT]  87.9,40.58 270 top
C372  1.0uF  [0402-TIGHT]  90.5,39.28 180 top
C373  0.47uF  [0402-TIGHT]  86.5,46.08 180 top
C374  2.2uF  [0402-TIGHT]  86.5,44.48 180 top
C375  2.2uF  [0402-TIGHT]  88.7,39.28 180 top
C376  2.2uF  [0402-TIGHT]  91.2,40.68 270 top
C377  1.0uF  [0402-TIGHT]  85.5,40.58 270 top
C378  1.0uF  [0402-TIGHT]  94,45.98 0 top
C379  1.0uF  [0402-TIGHT]  86.5,45.28 180 top
C380  1.0uF  [0402-TIGHT]  94,45.08 0 top
C381  47nF  [0402-TIGHT]  93.99,44.18 0 top
C382  2.2uF  [0402-TIGHT]  86.3,40.58 270 top
C383  DNP  [0402-TIGHT]  93.52,42.9 90 top
C384  0.5pF  [0402-TIGHT]  94.8,43.38 180 top
C385  6pF  [0402-TIGHT]  15.26,49.79 180 top
C386  6pF  [0402-TIGHT]  16.96,51.19 90 top
C387  4.7uF  [0402-TIGHT]  10.36,51.09 270 top
C388  1.0uF  [0402-TIGHT]  12.96,49.79 180 top
C389  0.47uF  [0402-TIGHT]  8.96,56.59 180 top
C390  2.2uF  [0402-TIGHT]  8.96,54.99 180 top
C391  2.2uF  [0402-TIGHT]  11.16,49.79 180 top
C392  2.2uF  [0402-TIGHT]  13.66,51.19 270 top
C393  1.0uF  [0402-TIGHT]  7.96,51.09 270 top
C394  1.0uF  [0402-TIGHT]  16.46,56.49 0 top
C395  1.0uF  [0402-TIGHT]  8.96,55.79 180 top
C396  1.0uF  [0402-TIGHT]  16.46,55.59 0 top
C397  47nF  [0402-TIGHT]  16.45,54.69 0 top
C398  2.2uF  [0402-TIGHT]  8.76,51.09 270 top
C399  DNP  [0402-TIGHT]  15.98,53.41 90 top
C400  0.5pF  [0402-TIGHT]  17.26,53.89 180 top
C401  6pF  [0402-TIGHT]  30.77,49.79 180 top
C402  6pF  [0402-TIGHT]  32.47,51.19 90 top
C403  4.7uF  [0402-TIGHT]  25.87,51.09 270 top
C404  1.0uF  [0402-TIGHT]  28.47,49.79 180 top
C405  0.47uF  [0402-TIGHT]  24.47,56.59 180 top
C406  2.2uF  [0402-TIGHT]  24.47,54.99 180 top
C407  2.2uF  [0402-TIGHT]  26.67,49.79 180 top
C408  2.2uF  [0402-TIGHT]  29.17,51.19 270 top
C409  1.0uF  [0402-TIGHT]  23.47,51.09 270 top
C410  1.0uF  [0402-TIGHT]  31.97,56.49 0 top
C411  1.0uF  [0402-TIGHT]  24.47,55.79 180 top
C412  1.0uF  [0402-TIGHT]  31.97,55.59 0 top
C413  47nF  [0402-TIGHT]  31.95,54.69 0 top
C414  2.2uF  [0402-TIGHT]  24.27,51.09 270 top
C415  DNP  [0402-TIGHT]  31.49,53.41 90 top
C416  0.5pF  [0402-TIGHT]  32.77,53.89 180 top
C417  6pF  [0402-TIGHT]  46.27,49.79 180 top
C418  6pF  [0402-TIGHT]  47.97,51.19 90 top
C419  4.7uF  [0402-TIGHT]  41.37,51.09 270 top
C420  1.0uF  [0402-TIGHT]  43.97,49.79 180 top
C421  0.47uF  [0402-TIGHT]  39.97,56.59 180 top
C422  2.2uF  [0402-TIGHT]  39.97,54.99 180 top
C423  2.2uF  [0402-TIGHT]  42.17,49.79 180 top
C424  2.2uF  [0402-TIGHT]  44.67,51.19 270 top
C425  1.0uF  [0402-TIGHT]  38.97,51.09 270 top
C426  1.0uF  [0402-TIGHT]  47.47,56.49 0 top
C427  1.0uF  [0402-TIGHT]  39.97,55.79 180 top
C428  1.0uF  [0402-TIGHT]  47.47,55.59 0 top
C429  47nF  [0402-TIGHT]  47.46,54.69 0 top
C430  2.2uF  [0402-TIGHT]  39.77,51.09 270 top
C431  DNP  [0402-TIGHT]  46.99,53.41 90 top
C432  0.5pF  [0402-TIGHT]  48.27,53.89 180 top
C433  6pF  [0402-TIGHT]  61.78,49.79 180 top
C434  6pF  [0402-TIGHT]  63.48,51.19 90 top
C435  4.7uF  [0402-TIGHT]  56.88,51.09 270 top
C436  1.0uF  [0402-TIGHT]  59.48,49.79 180 top
C437  0.47uF  [0402-TIGHT]  55.48,56.59 180 top
C438  2.2uF  [0402-TIGHT]  55.48,54.99 180 top
C439  2.2uF  [0402-TIGHT]  57.68,49.79 180 top
C440  2.2uF  [0402-TIGHT]  60.18,51.19 270 top
C441  1.0uF  [0402-TIGHT]  54.48,51.09 270 top
C442  1.0uF  [0402-TIGHT]  62.98,56.49 0 top
C443  1.0uF  [0402-TIGHT]  55.48,55.79 180 top
C444  1.0uF  [0402-TIGHT]  62.98,55.59 0 top
C445  47nF  [0402-TIGHT]  62.97,54.69 0 top
C446  2.2uF  [0402-TIGHT]  55.28,51.09 270 top
C447  DNP  [0402-TIGHT]  62.5,53.41 90 top
C448  0.5pF  [0402-TIGHT]  63.78,53.89 180 top
C449  6pF  [0402-TIGHT]  77.29,49.79 180 top
C450  6pF  [0402-TIGHT]  78.99,51.19 90 top
C451  4.7uF  [0402-TIGHT]  72.39,51.09 270 top
C452  1.0uF  [0402-TIGHT]  74.99,49.79 180 top
C453  0.47uF  [0402-TIGHT]  70.99,56.59 180 top
C454  2.2uF  [0402-TIGHT]  70.99,54.99 180 top
C455  2.2uF  [0402-TIGHT]  73.19,49.79 180 top
C456  2.2uF  [0402-TIGHT]  75.69,51.19 270 top
C457  1.0uF  [0402-TIGHT]  69.99,51.09 270 top
C458  1.0uF  [0402-TIGHT]  78.49,56.49 0 top
C459  1.0uF  [0402-TIGHT]  70.99,55.79 180 top
C460  1.0uF  [0402-TIGHT]  78.49,55.59 0 top
C461  47nF  [0402-TIGHT]  78.48,54.69 0 top
C462  2.2uF  [0402-TIGHT]  70.79,51.09 270 top
C463  DNP  [0402-TIGHT]  78.01,53.41 90 top
C464  0.5pF  [0402-TIGHT]  79.29,53.89 180 top
C465  6pF  [0402-TIGHT]  92.8,49.79 180 top
C466  6pF  [0402-TIGHT]  94.5,51.19 90 top
C467  4.7uF  [0402-TIGHT]  87.9,51.09 270 top
C468  1.0uF  [0402-TIGHT]  90.5,49.79 180 top
C469  0.47uF  [0402-TIGHT]  86.5,56.59 180 top
C470  2.2uF  [0402-TIGHT]  86.5,54.99 180 top
C471  2.2uF  [0402-TIGHT]  88.7,49.79 180 top
C472  2.2uF  [0402-TIGHT]  91.2,51.19 270 top
C473  1.0uF  [0402-TIGHT]  85.5,51.09 270 top
C474  1.0uF  [0402-TIGHT]  94,56.49 0 top
C475  1.0uF  [0402-TIGHT]  86.5,55.79 180 top
C476  1.0uF  [0402-TIGHT]  94,55.59 0 top
C477  47nF  [0402-TIGHT]  93.99,54.69 0 top
C478  2.2uF  [0402-TIGHT]  86.3,51.09 270 top
C479  DNP  [0402-TIGHT]  93.52,53.41 90 top
C480  0.5pF  [0402-TIGHT]  94.8,53.89 180 top
C481  6pF  [0402-TIGHT]  15.26,60.3 180 top
C482  6pF  [0402-TIGHT]  16.96,61.7 90 top
C483  4.7uF  [0402-TIGHT]  10.36,61.6 270 top
C484  1.0uF  [0402-TIGHT]  12.96,60.3 180 top
C485  0.47uF  [0402-TIGHT]  8.96,67.1 180 top
C486  2.2uF  [0402-TIGHT]  8.96,65.5 180 top
C487  2.2uF  [0402-TIGHT]  11.16,60.3 180 top
C488  2.2uF  [0402-TIGHT]  13.66,61.7 270 top
C489  1.0uF  [0402-TIGHT]  7.96,61.6 270 top
C490  1.0uF  [0402-TIGHT]  16.46,67 0 top
C491  1.0uF  [0402-TIGHT]  8.96,66.3 180 top
C492  1.0uF  [0402-TIGHT]  16.46,66.1 0 top
C493  47nF  [0402-TIGHT]  16.45,65.2 0 top
C494  2.2uF  [0402-TIGHT]  8.76,61.6 270 top
C495  DNP  [0402-TIGHT]  15.98,63.92 90 top
C496  0.5pF  [0402-TIGHT]  17.26,64.4 180 top
C497  6pF  [0402-TIGHT]  30.77,60.3 180 top
C498  6pF  [0402-TIGHT]  32.47,61.7 90 top
C499  4.7uF  [0402-TIGHT]  25.87,61.6 270 top
C500  1.0uF  [0402-TIGHT]  28.47,60.3 180 top
C501  0.47uF  [0402-TIGHT]  24.47,67.1 180 top
C502  2.2uF  [0402-TIGHT]  24.47,65.5 180 top
C503  2.2uF  [0402-TIGHT]  26.67,60.3 180 top
C504  2.2uF  [0402-TIGHT]  29.17,61.7 270 top
C505  1.0uF  [0402-TIGHT]  23.47,61.6 270 top
C506  1.0uF  [0402-TIGHT]  31.97,67 0 top
C507  1.0uF  [0402-TIGHT]  24.47,66.3 180 top
C508  1.0uF  [0402-TIGHT]  31.97,66.1 0 top
C509  47nF  [0402-TIGHT]  31.95,65.2 0 top
C510  2.2uF  [0402-TIGHT]  24.27,61.6 270 top
C511  DNP  [0402-TIGHT]  31.49,63.92 90 top
C512  0.5pF  [0402-TIGHT]  32.77,64.4 180 top
C513  6pF  [0402-TIGHT]  46.27,60.3 180 top
C514  6pF  [0402-TIGHT]  47.97,61.7 90 top
C515  4.7uF  [0402-TIGHT]  41.37,61.6 270 top
C516  1.0uF  [0402-TIGHT]  43.97,60.3 180 top
C517  0.47uF  [0402-TIGHT]  39.97,67.1 180 top
C518  2.2uF  [0402-TIGHT]  39.97,65.5 180 top
C519  2.2uF  [0402-TIGHT]  42.17,60.3 180 top
C520  2.2uF  [0402-TIGHT]  44.67,61.7 270 top
C521  1.0uF  [0402-TIGHT]  38.97,61.6 270 top
C522  1.0uF  [0402-TIGHT]  47.47,67 0 top
C523  1.0uF  [0402-TIGHT]  39.97,66.3 180 top
C524  1.0uF  [0402-TIGHT]  47.47,66.1 0 top
C525  47nF  [0402-TIGHT]  47.46,65.2 0 top
C526  2.2uF  [0402-TIGHT]  39.77,61.6 270 top
C527  DNP  [0402-TIGHT]  46.99,63.92 90 top
C528  0.5pF  [0402-TIGHT]  48.27,64.4 180 top
C529  6pF  [0402-TIGHT]  61.78,60.3 180 top
C530  6pF  [0402-TIGHT]  63.48,61.7 90 top
C531  4.7uF  [0402-TIGHT]  56.88,61.6 270 top
C532  1.0uF  [0402-TIGHT]  59.48,60.3 180 top
C533  0.47uF  [0402-TIGHT]  55.48,67.1 180 top
C534  2.2uF  [0402-TIGHT]  55.48,65.5 180 top
C535  2.2uF  [0402-TIGHT]  57.68,60.3 180 top
C536  2.2uF  [0402-TIGHT]  60.18,61.7 270 top
C537  1.0uF  [0402-TIGHT]  54.48,61.6 270 top
C538  1.0uF  [0402-TIGHT]  62.98,67 0 top
C539  1.0uF  [0402-TIGHT]  55.48,66.3 180 top
C540  1.0uF  [0402-TIGHT]  62.98,66.1 0 top
C541  47nF  [0402-TIGHT]  62.97,65.2 0 top
C542  2.2uF  [0402-TIGHT]  55.28,61.6 270 top
C543  DNP  [0402-TIGHT]  62.5,63.92 90 top
C544  0.5pF  [0402-TIGHT]  63.78,64.4 180 top
C545  6pF  [0402-TIGHT]  77.29,60.3 180 top
C546  6pF  [0402-TIGHT]  78.99,61.7 90 top
C547  4.7uF  [0402-TIGHT]  72.39,61.6 270 top
C548  1.0uF  [0402-TIGHT]  74.99,60.3 180 top
C549  0.47uF  [0402-TIGHT]  70.99,67.1 180 top
C550  2.2uF  [0402-TIGHT]  70.99,65.5 180 top
C551  2.2uF  [0402-TIGHT]  73.19,60.3 180 top
C552  2.2uF  [0402-TIGHT]  75.69,61.7 270 top
C553  1.0uF  [0402-TIGHT]  69.99,61.6 270 top
C554  1.0uF  [0402-TIGHT]  78.49,67 0 top
C555  1.0uF  [0402-TIGHT]  70.99,66.3 180 top
C556  1.0uF  [0402-TIGHT]  78.49,66.1 0 top
C557  47nF  [0402-TIGHT]  78.48,65.2 0 top
C558  2.2uF  [0402-TIGHT]  70.79,61.6 270 top
C559  DNP  [0402-TIGHT]  78.01,63.92 90 top
C560  0.5pF  [0402-TIGHT]  79.29,64.4 180 top
C561  6pF  [0402-TIGHT]  92.8,60.3 180 top
C562  6pF  [0402-TIGHT]  94.5,61.7 90 top
C563  4.7uF  [0402-TIGHT]  87.9,61.6 270 top
C564  1.0uF  [0402-TIGHT]  90.5,60.3 180 top
C565  0.47uF  [0402-TIGHT]  86.5,67.1 180 top
C566  2.2uF  [0402-TIGHT]  86.5,65.5 180 top
C567  2.2uF  [0402-TIGHT]  88.7,60.3 180 top
C568  2.2uF  [0402-TIGHT]  91.2,61.7 270 top
C569  1.0uF  [0402-TIGHT]  85.5,61.6 270 top
C570  1.0uF  [0402-TIGHT]  94,67 0 top
C571  1.0uF  [0402-TIGHT]  86.5,66.3 180 top
C572  1.0uF  [0402-TIGHT]  94,66.1 0 top
C573  47nF  [0402-TIGHT]  93.99,65.2 0 top
C574  2.2uF  [0402-TIGHT]  86.3,61.6 270 top
C575  DNP  [0402-TIGHT]  93.52,63.92 90 top
C576  0.5pF  [0402-TIGHT]  94.8,64.4 180 top
C577  6pF  [0402-TIGHT]  15.26,70.81 180 top
C578  6pF  [0402-TIGHT]  16.96,72.21 90 top
C579  4.7uF  [0402-TIGHT]  10.36,72.11 270 top
C580  1.0uF  [0402-TIGHT]  12.96,70.81 180 top
C581  0.47uF  [0402-TIGHT]  8.96,77.61 180 top
C582  2.2uF  [0402-TIGHT]  8.96,76.01 180 top
C583  2.2uF  [0402-TIGHT]  11.16,70.81 180 top
C584  2.2uF  [0402-TIGHT]  13.66,72.21 270 top
C585  1.0uF  [0402-TIGHT]  7.96,72.11 270 top
C586  1.0uF  [0402-TIGHT]  16.46,77.51 0 top
C587  1.0uF  [0402-TIGHT]  8.96,76.81 180 top
C588  1.0uF  [0402-TIGHT]  16.46,76.61 0 top
C589  47nF  [0402-TIGHT]  16.45,75.71 0 top
C590  2.2uF  [0402-TIGHT]  8.76,72.11 270 top
C591  DNP  [0402-TIGHT]  15.98,74.43 90 top
C592  0.5pF  [0402-TIGHT]  17.26,74.91 180 top
C593  6pF  [0402-TIGHT]  30.77,70.81 180 top
C594  6pF  [0402-TIGHT]  32.47,72.21 90 top
C595  4.7uF  [0402-TIGHT]  25.87,72.11 270 top
C596  1.0uF  [0402-TIGHT]  28.47,70.81 180 top
C597  0.47uF  [0402-TIGHT]  24.47,77.61 180 top
C598  2.2uF  [0402-TIGHT]  24.47,76.01 180 top
C599  2.2uF  [0402-TIGHT]  26.67,70.81 180 top
C600  2.2uF  [0402-TIGHT]  29.17,72.21 270 top
C601  1.0uF  [0402-TIGHT]  23.47,72.11 270 top
C602  1.0uF  [0402-TIGHT]  31.97,77.51 0 top
C603  1.0uF  [0402-TIGHT]  24.47,76.81 180 top
C604  1.0uF  [0402-TIGHT]  31.97,76.61 0 top
C605  47nF  [0402-TIGHT]  31.95,75.71 0 top
C606  2.2uF  [0402-TIGHT]  24.27,72.11 270 top
C607  DNP  [0402-TIGHT]  31.49,74.43 90 top
C608  0.5pF  [0402-TIGHT]  32.77,74.91 180 top
C609  6pF  [0402-TIGHT]  46.27,70.81 180 top
C610  6pF  [0402-TIGHT]  47.97,72.21 90 top
C611  4.7uF  [0402-TIGHT]  41.37,72.11 270 top
C612  1.0uF  [0402-TIGHT]  43.97,70.81 180 top
C613  0.47uF  [0402-TIGHT]  39.97,77.61 180 top
C614  2.2uF  [0402-TIGHT]  39.97,76.01 180 top
C615  2.2uF  [0402-TIGHT]  42.17,70.81 180 top
C616  2.2uF  [0402-TIGHT]  44.67,72.21 270 top
C617  1.0uF  [0402-TIGHT]  38.97,72.11 270 top
C618  1.0uF  [0402-TIGHT]  47.47,77.51 0 top
C619  1.0uF  [0402-TIGHT]  39.97,76.81 180 top
C620  1.0uF  [0402-TIGHT]  47.47,76.61 0 top
C621  47nF  [0402-TIGHT]  47.46,75.71 0 top
C622  2.2uF  [0402-TIGHT]  39.77,72.11 270 top
C623  DNP  [0402-TIGHT]  46.99,74.43 90 top
C624  0.5pF  [0402-TIGHT]  48.27,74.91 180 top
C625  6pF  [0402-TIGHT]  61.78,70.81 180 top
C626  6pF  [0402-TIGHT]  63.48,72.21 90 top
C627  4.7uF  [0402-TIGHT]  56.88,72.11 270 top
C628  1.0uF  [0402-TIGHT]  59.48,70.81 180 top
C629  0.47uF  [0402-TIGHT]  55.48,77.61 180 top
C630  2.2uF  [0402-TIGHT]  55.48,76.01 180 top
C631  2.2uF  [0402-TIGHT]  57.68,70.81 180 top
C632  2.2uF  [0402-TIGHT]  60.18,72.21 270 top
C633  1.0uF  [0402-TIGHT]  54.48,72.11 270 top
C634  1.0uF  [0402-TIGHT]  62.98,77.51 0 top
C635  1.0uF  [0402-TIGHT]  55.48,76.81 180 top
C636  1.0uF  [0402-TIGHT]  62.98,76.61 0 top
C637  47nF  [0402-TIGHT]  62.97,75.71 0 top
C638  2.2uF  [0402-TIGHT]  55.28,72.11 270 top
C639  DNP  [0402-TIGHT]  62.5,74.43 90 top
C640  0.5pF  [0402-TIGHT]  63.78,74.91 180 top
C641  6pF  [0402-TIGHT]  77.29,70.81 180 top
C642  6pF  [0402-TIGHT]  78.99,72.21 90 top
C643  4.7uF  [0402-TIGHT]  72.39,72.11 270 top
C644  1.0uF  [0402-TIGHT]  74.99,70.81 180 top
C645  0.47uF  [0402-TIGHT]  70.99,77.61 180 top
C646  2.2uF  [0402-TIGHT]  70.99,76.01 180 top
C647  2.2uF  [0402-TIGHT]  73.19,70.81 180 top
C648  2.2uF  [0402-TIGHT]  75.69,72.21 270 top
C649  1.0uF  [0402-TIGHT]  69.99,72.11 270 top
C650  1.0uF  [0402-TIGHT]  78.49,77.51 0 top
C651  1.0uF  [0402-TIGHT]  70.99,76.81 180 top
C652  1.0uF  [0402-TIGHT]  78.49,76.61 0 top
C653  47nF  [0402-TIGHT]  78.48,75.71 0 top
C654  2.2uF  [0402-TIGHT]  70.79,72.11 270 top
C655  DNP  [0402-TIGHT]  78.01,74.43 90 top
C656  0.5pF  [0402-TIGHT]  79.29,74.91 180 top
C657  6pF  [0402-TIGHT]  92.8,70.81 180 top
C658  6pF  [0402-TIGHT]  94.5,72.21 90 top
C659  4.7uF  [0402-TIGHT]  87.9,72.11 270 top
C660  1.0uF  [0402-TIGHT]  90.5,70.81 180 top
C661  0.47uF  [0402-TIGHT]  86.5,77.61 180 top
C662  2.2uF  [0402-TIGHT]  86.5,76.01 180 top
C663  2.2uF  [0402-TIGHT]  88.7,70.81 180 top
C664  2.2uF  [0402-TIGHT]  91.2,72.21 270 top
C665  1.0uF  [0402-TIGHT]  85.5,72.11 270 top
C666  1.0uF  [0402-TIGHT]  94,77.51 0 top
C667  1.0uF  [0402-TIGHT]  86.5,76.81 180 top
C668  1.0uF  [0402-TIGHT]  94,76.61 0 top
C669  47nF  [0402-TIGHT]  93.99,75.71 0 top
C670  2.2uF  [0402-TIGHT]  86.3,72.11 270 top
C671  DNP  [0402-TIGHT]  93.52,74.43 90 top
C672  0.5pF  [0402-TIGHT]  94.8,74.91 180 top
C673  6pF  [0402-TIGHT]  15.26,81.31 180 top
C674  6pF  [0402-TIGHT]  16.96,82.71 90 top
C675  4.7uF  [0402-TIGHT]  10.36,82.61 270 top
C676  1.0uF  [0402-TIGHT]  12.96,81.31 180 top
C677  0.47uF  [0402-TIGHT]  8.96,88.11 180 top
C678  2.2uF  [0402-TIGHT]  8.96,86.51 180 top
C679  2.2uF  [0402-TIGHT]  11.16,81.31 180 top
C680  2.2uF  [0402-TIGHT]  13.66,82.71 270 top
C681  1.0uF  [0402-TIGHT]  7.96,82.61 270 top
C682  1.0uF  [0402-TIGHT]  16.46,88.01 0 top
C683  1.0uF  [0402-TIGHT]  8.96,87.31 180 top
C684  1.0uF  [0402-TIGHT]  16.46,87.11 0 top
C685  47nF  [0402-TIGHT]  16.45,86.21 0 top
C686  2.2uF  [0402-TIGHT]  8.76,82.61 270 top
C687  DNP  [0402-TIGHT]  15.98,84.94 90 top
C688  0.5pF  [0402-TIGHT]  17.26,85.41 180 top
C689  6pF  [0402-TIGHT]  30.77,81.31 180 top
C690  6pF  [0402-TIGHT]  32.47,82.71 90 top
C691  4.7uF  [0402-TIGHT]  25.87,82.61 270 top
C692  1.0uF  [0402-TIGHT]  28.47,81.31 180 top
C693  0.47uF  [0402-TIGHT]  24.47,88.11 180 top
C694  2.2uF  [0402-TIGHT]  24.47,86.51 180 top
C695  2.2uF  [0402-TIGHT]  26.67,81.31 180 top
C696  2.2uF  [0402-TIGHT]  29.17,82.71 270 top
C697  1.0uF  [0402-TIGHT]  23.47,82.61 270 top
C698  1.0uF  [0402-TIGHT]  31.97,88.01 0 top
C699  1.0uF  [0402-TIGHT]  24.47,87.31 180 top
C700  1.0uF  [0402-TIGHT]  31.97,87.11 0 top
C701  47nF  [0402-TIGHT]  31.95,86.21 0 top
C702  2.2uF  [0402-TIGHT]  24.27,82.61 270 top
C703  DNP  [0402-TIGHT]  31.49,84.94 90 top
C704  0.5pF  [0402-TIGHT]  32.77,85.41 180 top
C705  6pF  [0402-TIGHT]  46.27,81.31 180 top
C706  6pF  [0402-TIGHT]  47.97,82.71 90 top
C707  4.7uF  [0402-TIGHT]  41.37,82.61 270 top
C708  1.0uF  [0402-TIGHT]  43.97,81.31 180 top
C709  0.47uF  [0402-TIGHT]  39.97,88.11 180 top
C710  2.2uF  [0402-TIGHT]  39.97,86.51 180 top
C711  2.2uF  [0402-TIGHT]  42.17,81.31 180 top
C712  2.2uF  [0402-TIGHT]  44.67,82.71 270 top
C713  1.0uF  [0402-TIGHT]  38.97,82.61 270 top
C714  1.0uF  [0402-TIGHT]  47.47,88.01 0 top
C715  1.0uF  [0402-TIGHT]  39.97,87.31 180 top
C716  1.0uF  [0402-TIGHT]  47.47,87.11 0 top
C717  47nF  [0402-TIGHT]  47.46,86.21 0 top
C718  2.2uF  [0402-TIGHT]  39.77,82.61 270 top
C719  DNP  [0402-TIGHT]  46.99,84.94 90 top
C720  0.5pF  [0402-TIGHT]  48.27,85.41 180 top
C721  6pF  [0402-TIGHT]  61.78,81.31 180 top
C722  6pF  [0402-TIGHT]  63.48,82.71 90 top
C723  4.7uF  [0402-TIGHT]  56.88,82.61 270 top
C724  1.0uF  [0402-TIGHT]  59.48,81.31 180 top
C725  0.47uF  [0402-TIGHT]  55.48,88.11 180 top
C726  2.2uF  [0402-TIGHT]  55.48,86.51 180 top
C727  2.2uF  [0402-TIGHT]  57.68,81.31 180 top
C728  2.2uF  [0402-TIGHT]  60.18,82.71 270 top
C729  1.0uF  [0402-TIGHT]  54.48,82.61 270 top
C730  1.0uF  [0402-TIGHT]  62.98,88.01 0 top
C731  1.0uF  [0402-TIGHT]  55.48,87.31 180 top
C732  1.0uF  [0402-TIGHT]  62.98,87.11 0 top
C733  47nF  [0402-TIGHT]  62.97,86.21 0 top
C734  2.2uF  [0402-TIGHT]  55.28,82.61 270 top
C735  DNP  [0402-TIGHT]  62.5,84.94 90 top
C736  0.5pF  [0402-TIGHT]  63.78,85.41 180 top
C737  6pF  [0402-TIGHT]  77.29,81.31 180 top
C738  6pF  [0402-TIGHT]  78.99,82.71 90 top
C739  4.7uF  [0402-TIGHT]  72.39,82.61 270 top
C740  1.0uF  [0402-TIGHT]  74.99,81.31 180 top
C741  0.47uF  [0402-TIGHT]  70.99,88.11 180 top
C742  2.2uF  [0402-TIGHT]  70.99,86.51 180 top
C743  2.2uF  [0402-TIGHT]  73.19,81.31 180 top
C744  2.2uF  [0402-TIGHT]  75.69,82.71 270 top
C745  1.0uF  [0402-TIGHT]  69.99,82.61 270 top
C746  1.0uF  [0402-TIGHT]  78.49,88.01 0 top
C747  1.0uF  [0402-TIGHT]  70.99,87.31 180 top
C748  1.0uF  [0402-TIGHT]  78.49,87.11 0 top
C749  47nF  [0402-TIGHT]  78.48,86.21 0 top
C750  2.2uF  [0402-TIGHT]  70.79,82.61 270 top
C751  DNP  [0402-TIGHT]  78.01,84.94 90 top
C752  0.5pF  [0402-TIGHT]  79.29,85.41 180 top
C753  6pF  [0402-TIGHT]  92.8,81.31 180 top
C754  6pF  [0402-TIGHT]  94.5,82.71 90 top
C755  4.7uF  [0402-TIGHT]  87.9,82.61 270 top
C756  1.0uF  [0402-TIGHT]  90.5,81.31 180 top
C757  0.47uF  [0402-TIGHT]  86.5,88.11 180 top
C758  2.2uF  [0402-TIGHT]  86.5,86.51 180 top
C759  2.2uF  [0402-TIGHT]  88.7,81.31 180 top
C760  2.2uF  [0402-TIGHT]  91.2,82.71 270 top
C761  1.0uF  [0402-TIGHT]  85.5,82.61 270 top
C762  1.0uF  [0402-TIGHT]  94,88.01 0 top
C763  1.0uF  [0402-TIGHT]  86.5,87.31 180 top
C764  1.0uF  [0402-TIGHT]  94,87.11 0 top
C765  47nF  [0402-TIGHT]  93.99,86.21 0 top
C766  2.2uF  [0402-TIGHT]  86.3,82.61 270 top
C767  DNP  [0402-TIGHT]  93.52,84.94 90 top
C768  0.5pF  [0402-TIGHT]  94.8,85.41 180 top
E$1  [FIDUCIAL-1X2]  13.72,92.51 0 top
E$2  [FIDUCIAL-1X2]  13.72,92.51 0 bottom
E$3  [FIDUCIAL-1X2]  92.54,92.51 0 top
E$4  [FIDUCIAL-1X2]  92.54,92.51 0 bottom
E$5  [FIDUCIAL-1.5X3]  13.72,4.76 0 top
E$6  [FIDUCIAL-1.5X3]  13.72,4.76 0 bottom
FD1  FIDUCIAL0.2MM  [FIDUCIAL-0.2MM]  23.25,7.75 0 top
FD2  FIDUCIAL0.2MM  [FIDUCIAL-0.2MM]  33.54,15.88 0 top
FD3  FIDUCIAL0.2MM  [FIDUCIAL-0.2MM]  7.75,7.75 0 top
FD4  FIDUCIAL0.2MM  [FIDUCIAL-0.2MM]  18.03,15.88 0 top
FD5  FIDUCIAL0.2MM  [FIDUCIAL-0.2MM]  38.76,7.75 0 top
FD6  FIDUCIAL0.2MM  [FIDUCIAL-0.2MM]  49.05,15.88 0 top
FD7  FIDUCIAL0.2MM  [FIDUCIAL-0.2MM]  54.27,7.75 0 top
FD8  FIDUCIAL0.2MM  [FIDUCIAL-0.2MM]  64.56,15.88 0 top
FD9  FIDUCIAL0.2MM  [FIDUCIAL-0.2MM]  69.78,7.75 0 top
FD10  FIDUCIAL0.2MM  [FIDUCIAL-0.2MM]  80.07,15.88 0 top
FD11  FIDUCIAL0.2MM  [FIDUCIAL-0.2MM]  85.29,7.75 0 top
FD12  FIDUCIAL0.2MM  [FIDUCIAL-0.2MM]  95.57,15.88 0 top
FD13  FIDUCIAL0.2MM  [FIDUCIAL-0.2MM]  7.75,18.26 0 top
FD14  FIDUCIAL0.2MM  [FIDUCIAL-0.2MM]  18.03,26.38 0 top
FD15  FIDUCIAL0.2MM  [FIDUCIAL-0.2MM]  23.25,18.26 0 top
FD16  FIDUCIAL0.2MM  [FIDUCIAL-0.2MM]  33.54,26.38 0 top
FD17  FIDUCIAL0.2MM  [FIDUCIAL-0.2MM]  38.76,18.26 0 top
FD18  FIDUCIAL0.2MM  [FIDUCIAL-0.2MM]  49.05,26.38 0 top
FD19  FIDUCIAL0.2MM  [FIDUCIAL-0.2MM]  54.27,18.26 0 top
FD20  FIDUCIAL0.2MM  [FIDUCIAL-0.2MM]  64.56,26.38 0 top
FD21  FIDUCIAL0.2MM  [FIDUCIAL-0.2MM]  69.78,18.26 0 top
FD22  FIDUCIAL0.2MM  [FIDUCIAL-0.2MM]  80.07,26.38 0 top
FD23  FIDUCIAL0.2MM  [FIDUCIAL-0.2MM]  85.29,18.26 0 top
FD24  FIDUCIAL0.2MM  [FIDUCIAL-0.2MM]  95.57,26.38 0 top
FD25  FIDUCIAL0.2MM  [FIDUCIAL-0.2MM]  7.75,28.76 0 top
FD26  FIDUCIAL0.2MM  [FIDUCIAL-0.2MM]  18.03,36.89 0 top
FD27  FIDUCIAL0.2MM  [FIDUCIAL-0.2MM]  23.25,28.76 0 top
FD28  FIDUCIAL0.2MM  [FIDUCIAL-0.2MM]  33.54,36.89 0 top
FD29  FIDUCIAL0.2MM  [FIDUCIAL-0.2MM]  38.76,28.76 0 top
FD30  FIDUCIAL0.2MM  [FIDUCIAL-0.2MM]  49.05,36.89 0 top
FD31  FIDUCIAL0.2MM  [FIDUCIAL-0.2MM]  54.27,28.76 0 top
FD32  FIDUCIAL0.2MM  [FIDUCIAL-0.2MM]  64.56,36.89 0 top
FD33  FIDUCIAL0.2MM  [FIDUCIAL-0.2MM]  69.78,28.76 0 top
FD34  FIDUCIAL0.2MM  [FIDUCIAL-0.2MM]  80.07,36.89 0 top
FD35  FIDUCIAL0.2MM  [FIDUCIAL-0.2MM]  85.29,28.76 0 top
FD36  FIDUCIAL0.2MM  [FIDUCIAL-0.2MM]  95.57,36.89 0 top
FD37  FIDUCIAL0.2MM  [FIDUCIAL-0.2MM]  7.75,39.27 0 top
FD38  FIDUCIAL0.2MM  [FIDUCIAL-0.2MM]  18.03,47.4 0 top
FD39  FIDUCIAL0.2MM  [FIDUCIAL-0.2MM]  23.25,39.27 0 top
FD40  FIDUCIAL0.2MM  [FIDUCIAL-0.2MM]  33.54,47.4 0 top
FD41  FIDUCIAL0.2MM  [FIDUCIAL-0.2MM]  38.76,39.27 0 top
FD42  FIDUCIAL0.2MM  [FIDUCIAL-0.2MM]  49.05,47.4 0 top
FD43  FIDUCIAL0.2MM  [FIDUCIAL-0.2MM]  54.27,39.27 0 top
FD44  FIDUCIAL0.2MM  [FIDUCIAL-0.2MM]  64.56,47.4 0 top
FD45  FIDUCIAL0.2MM  [FIDUCIAL-0.2MM]  69.78,39.27 0 top
FD46  FIDUCIAL0.2MM  [FIDUCIAL-0.2MM]  80.07,47.4 0 top
FD47  FIDUCIAL0.2MM  [FIDUCIAL-0.2MM]  85.29,39.27 0 top
FD48  FIDUCIAL0.2MM  [FIDUCIAL-0.2MM]  95.57,47.4 0 top
FD49  FIDUCIAL0.2MM  [FIDUCIAL-0.2MM]  7.75,49.78 0 top
FD50  FIDUCIAL0.2MM  [FIDUCIAL-0.2MM]  18.03,57.91 0 top
FD51  FIDUCIAL0.2MM  [FIDUCIAL-0.2MM]  23.25,49.78 0 top
FD52  FIDUCIAL0.2MM  [FIDUCIAL-0.2MM]  33.54,57.91 0 top
FD53  FIDUCIAL0.2MM  [FIDUCIAL-0.2MM]  38.76,49.78 0 top
FD54  FIDUCIAL0.2MM  [FIDUCIAL-0.2MM]  49.05,57.91 0 top
FD55  FIDUCIAL0.2MM  [FIDUCIAL-0.2MM]  54.27,49.78 0 top
FD56  FIDUCIAL0.2MM  [FIDUCIAL-0.2MM]  64.56,57.91 0 top
FD57  FIDUCIAL0.2MM  [FIDUCIAL-0.2MM]  69.78,49.78 0 top
FD58  FIDUCIAL0.2MM  [FIDUCIAL-0.2MM]  80.07,57.91 0 top
FD59  FIDUCIAL0.2MM  [FIDUCIAL-0.2MM]  85.29,49.78 0 top
FD60  FIDUCIAL0.2MM  [FIDUCIAL-0.2MM]  95.57,57.91 0 top
FD61  FIDUCIAL0.2MM  [FIDUCIAL-0.2MM]  7.75,60.29 0 top
FD62  FIDUCIAL0.2MM  [FIDUCIAL-0.2MM]  18.03,68.42 0 top
FD63  FIDUCIAL0.2MM  [FIDUCIAL-0.2MM]  23.25,60.29 0 top
FD64  FIDUCIAL0.2MM  [FIDUCIAL-0.2MM]  33.54,68.42 0 top
FD65  FIDUCIAL0.2MM  [FIDUCIAL-0.2MM]  38.76,60.29 0 top
FD66  FIDUCIAL0.2MM  [FIDUCIAL-0.2MM]  49.05,68.42 0 top
FD67  FIDUCIAL0.2MM  [FIDUCIAL-0.2MM]  54.27,60.29 0 top
FD68  FIDUCIAL0.2MM  [FIDUCIAL-0.2MM]  64.56,68.42 0 top
FD69  FIDUCIAL0.2MM  [FIDUCIAL-0.2MM]  69.78,60.29 0 top
FD70  FIDUCIAL0.2MM  [FIDUCIAL-0.2MM]  80.07,68.42 0 top
FD71  FIDUCIAL0.2MM  [FIDUCIAL-0.2MM]  85.29,60.29 0 top
FD72  FIDUCIAL0.2MM  [FIDUCIAL-0.2MM]  95.57,68.42 0 top
FD73  FIDUCIAL0.2MM  [FIDUCIAL-0.2MM]  7.75,70.8 0 top
FD74  FIDUCIAL0.2MM  [FIDUCIAL-0.2MM]  18.03,78.92 0 top
FD75  FIDUCIAL0.2MM  [FIDUCIAL-0.2MM]  23.25,70.8 0 top
FD76  FIDUCIAL0.2MM  [FIDUCIAL-0.2MM]  33.54,78.92 0 top
FD77  FIDUCIAL0.2MM  [FIDUCIAL-0.2MM]  38.76,70.8 0 top
FD78  FIDUCIAL0.2MM  [FIDUCIAL-0.2MM]  49.05,78.92 0 top
FD79  FIDUCIAL0.2MM  [FIDUCIAL-0.2MM]  54.27,70.8 0 top
FD80  FIDUCIAL0.2MM  [FIDUCIAL-0.2MM]  64.56,78.92 0 top
FD81  FIDUCIAL0.2MM  [FIDUCIAL-0.2MM]  69.78,70.8 0 top
FD82  FIDUCIAL0.2MM  [FIDUCIAL-0.2MM]  80.07,78.92 0 top
FD83  FIDUCIAL0.2MM  [FIDUCIAL-0.2MM]  85.29,70.8 0 top
FD84  FIDUCIAL0.2MM  [FIDUCIAL-0.2MM]  95.57,78.92 0 top
FD85  FIDUCIAL0.2MM  [FIDUCIAL-0.2MM]  7.75,81.3 0 top
FD86  FIDUCIAL0.2MM  [FIDUCIAL-0.2MM]  18.03,89.43 0 top
FD87  FIDUCIAL0.2MM  [FIDUCIAL-0.2MM]  23.25,81.3 0 top
FD88  FIDUCIAL0.2MM  [FIDUCIAL-0.2MM]  33.54,89.43 0 top
FD89  FIDUCIAL0.2MM  [FIDUCIAL-0.2MM]  38.76,81.3 0 top
FD90  FIDUCIAL0.2MM  [FIDUCIAL-0.2MM]  49.05,89.43 0 top
FD91  FIDUCIAL0.2MM  [FIDUCIAL-0.2MM]  54.27,81.3 0 top
FD92  FIDUCIAL0.2MM  [FIDUCIAL-0.2MM]  64.56,89.43 0 top
FD93  FIDUCIAL0.2MM  [FIDUCIAL-0.2MM]  69.78,81.3 0 top
FD94  FIDUCIAL0.2MM  [FIDUCIAL-0.2MM]  80.07,89.43 0 top
FD95  FIDUCIAL0.2MM  [FIDUCIAL-0.2MM]  85.29,81.3 0 top
FD96  FIDUCIAL0.2MM  [FIDUCIAL-0.2MM]  95.57,89.43 0 top
J1  PAD.4X.6  [MODULE_PAD]  18.36,16.36 270 bottom
J2  PAD.4X.6  [MODULE_PAD]  17.86,15.56 270 bottom
J3  PAD.4X.6  [MODULE_PAD]  17.36,16.36 90 bottom
J4  PAD.4X.6  [MODULE_PAD]  16.86,15.56 270 bottom
J5  PAD.4X.6  [MODULE_PAD]  16.36,16.36 270 bottom
J6  PAD.4X.6  [MODULE_PAD]  15.86,15.56 270 bottom
J7  PAD.4X.6  [MODULE_PAD]  15.36,16.36 270 bottom
J8  PAD.4X.6  [MODULE_PAD]  14.86,15.56 270 bottom
J9  PAD.4X.6  [MODULE_PAD]  14.36,16.36 90 bottom
J10  PAD.4X.6  [MODULE_PAD]  13.86,15.56 90 bottom
J11  PAD.4X.6  [MODULE_PAD]  13.36,16.36 270 bottom
J12  PAD.4X.6  [MODULE_PAD]  12.86,15.56 270 bottom
J13  PAD.4X.6  [MODULE_PAD]  12.36,16.36 270 bottom
J14  PAD.4X.6  [MODULE_PAD]  11.86,15.56 90 bottom
J15  PAD.4X.6  [MODULE_PAD]  11.36,16.36 270 bottom
J16  PAD.4X.6  [MODULE_PAD]  10.86,15.56 90 bottom
J17  PAD.4X.6  [MODULE_PAD]  10.36,16.36 270 bottom
J18  PAD.4X.6  [MODULE_PAD]  9.86,15.56 90 bottom
J19  PAD.4X.6  [MODULE_PAD]  9.36,16.36 90 bottom
J20  PAD.4X.6  [MODULE_PAD]  8.86,15.56 90 bottom
J21  PAD.4X.6  [MODULE_PAD]  8.36,16.36 90 bottom
J22  PAD.35X.35  [MODULE_MINI_PAD]  7.36,16.36 90 bottom
J23  PAD.4X.6  [MODULE_PAD]  7.36,15.36 180 bottom
J24  PAD.4X.6  [MODULE_PAD]  8.16,14.86 0 bottom
J25  PAD.4X.6  [MODULE_PAD]  7.36,14.36 0 bottom
J26  PAD.4X.6  [MODULE_PAD]  8.16,13.86 180 bottom
J27  PAD.4X.6  [MODULE_PAD]  7.36,13.36 0 bottom
J28  PAD.4X.6  [MODULE_PAD]  8.16,12.86 180 bottom
J29  PAD.4X.6  [MODULE_PAD]  7.36,12.36 0 bottom
J30  PAD.4X.6  [MODULE_PAD]  8.16,11.86 180 bottom
J31  PAD.4X.6  [MODULE_PAD]  7.36,11.36 180 bottom
J32  PAD.4X.6  [MODULE_PAD]  8.16,10.86 0 bottom
J33  PAD.4X.6  [MODULE_PAD]  7.36,10.36 180 bottom
J34  PAD.4X.6  [MODULE_PAD]  8.16,9.86 0 bottom
J35  PAD.4X.6  [MODULE_PAD]  7.36,9.36 0 bottom
J36  PAD.4X.6  [MODULE_PAD]  8.16,8.86 180 bottom
J37  PAD.4X.6  [MODULE_PAD]  7.36,8.36 0 bottom
J38  PAD.35X.35  [MODULE_MINI_PAD]  7.36,7.36 0 bottom
J39  PAD.4X.6  [MODULE_PAD]  8.36,7.36 90 bottom
J40  PAD.4X.6  [MODULE_PAD]  8.86,8.16 270 bottom
J41  PAD.4X.6  [MODULE_PAD]  9.36,7.36 270 bottom
J42  PAD.4X.6  [MODULE_PAD]  9.86,8.16 270 bottom
J43  PAD.4X.6  [MODULE_PAD]  10.36,7.36 270 bottom
J44  PAD.4X.6  [MODULE_PAD]  10.86,8.16 90 bottom
J45  PAD.4X.6  [MODULE_PAD]  11.36,7.36 270 bottom
J46  PAD.4X.6  [MODULE_PAD]  11.86,8.16 270 bottom
J47  PAD.4X.6  [MODULE_PAD]  12.36,7.36 270 bottom
J48  PAD.4X.6  [MODULE_PAD]  12.86,8.16 270 bottom
J49  PAD.4X.6  [MODULE_PAD]  13.36,7.36 270 bottom
J50  PAD.4X.6  [MODULE_PAD]  13.86,8.16 90 bottom
J51  PAD.4X.6  [MODULE_PAD]  14.36,7.36 270 bottom
J52  PAD.4X.6  [MODULE_PAD]  14.86,8.16 90 bottom
J53  PAD.4X.6  [MODULE_PAD]  15.36,7.36 90 bottom
J54  PAD.4X.6  [MODULE_PAD]  15.86,8.16 270 bottom
J55  PAD.4X.6  [MODULE_PAD]  16.36,7.36 90 bottom
J56  PAD.4X.6  [MODULE_PAD]  16.86,8.16 270 bottom
J57  PAD.4X.6  [MODULE_PAD]  17.36,7.36 270 bottom
J58  PAD.4X.6  [MODULE_PAD]  17.86,8.16 270 bottom
J59  PAD.4X.6  [MODULE_PAD]  18.36,7.36 270 bottom
J60  PAD.4X.6  [MODULE_PAD]  29.37,15.56 90 bottom
J61  PAD.4X.6  [MODULE_PAD]  33.37,15.56 270 bottom
J62  PAD.4X.6  [MODULE_PAD]  30.87,16.36 270 bottom
J63  PAD.4X.6  [MODULE_PAD]  23.67,10.86 0 bottom
J64  PAD.4X.6  [MODULE_PAD]  23.67,13.86 180 bottom
J65  PAD.4X.6  [MODULE_PAD]  23.67,12.86 180 bottom
J66  PAD.4X.6  [MODULE_PAD]  24.87,16.36 90 bottom
J67  PAD.4X.6  [MODULE_PAD]  22.87,9.36 0 bottom
J68  PAD.4X.6  [MODULE_PAD]  23.67,9.86 0 bottom
J69  PAD.4X.6  [MODULE_PAD]  26.37,15.56 90 bottom
J70  PAD.4X.6  [MODULE_PAD]  22.87,14.36 0 bottom